# Altium PCB DAQ_v1.PcbDoc (part 1 of 2)
Units mil, origin at the board's own origin, x right, y up, seen from the top; angles counter-clockwise.
Board outline 4750 x 5000 mil, 4 copper layers (Component Side, Ground, Power, Solder Side), stack 61.2 mil thick; 174 components, 158 nets, 771 pads, 270 vias.
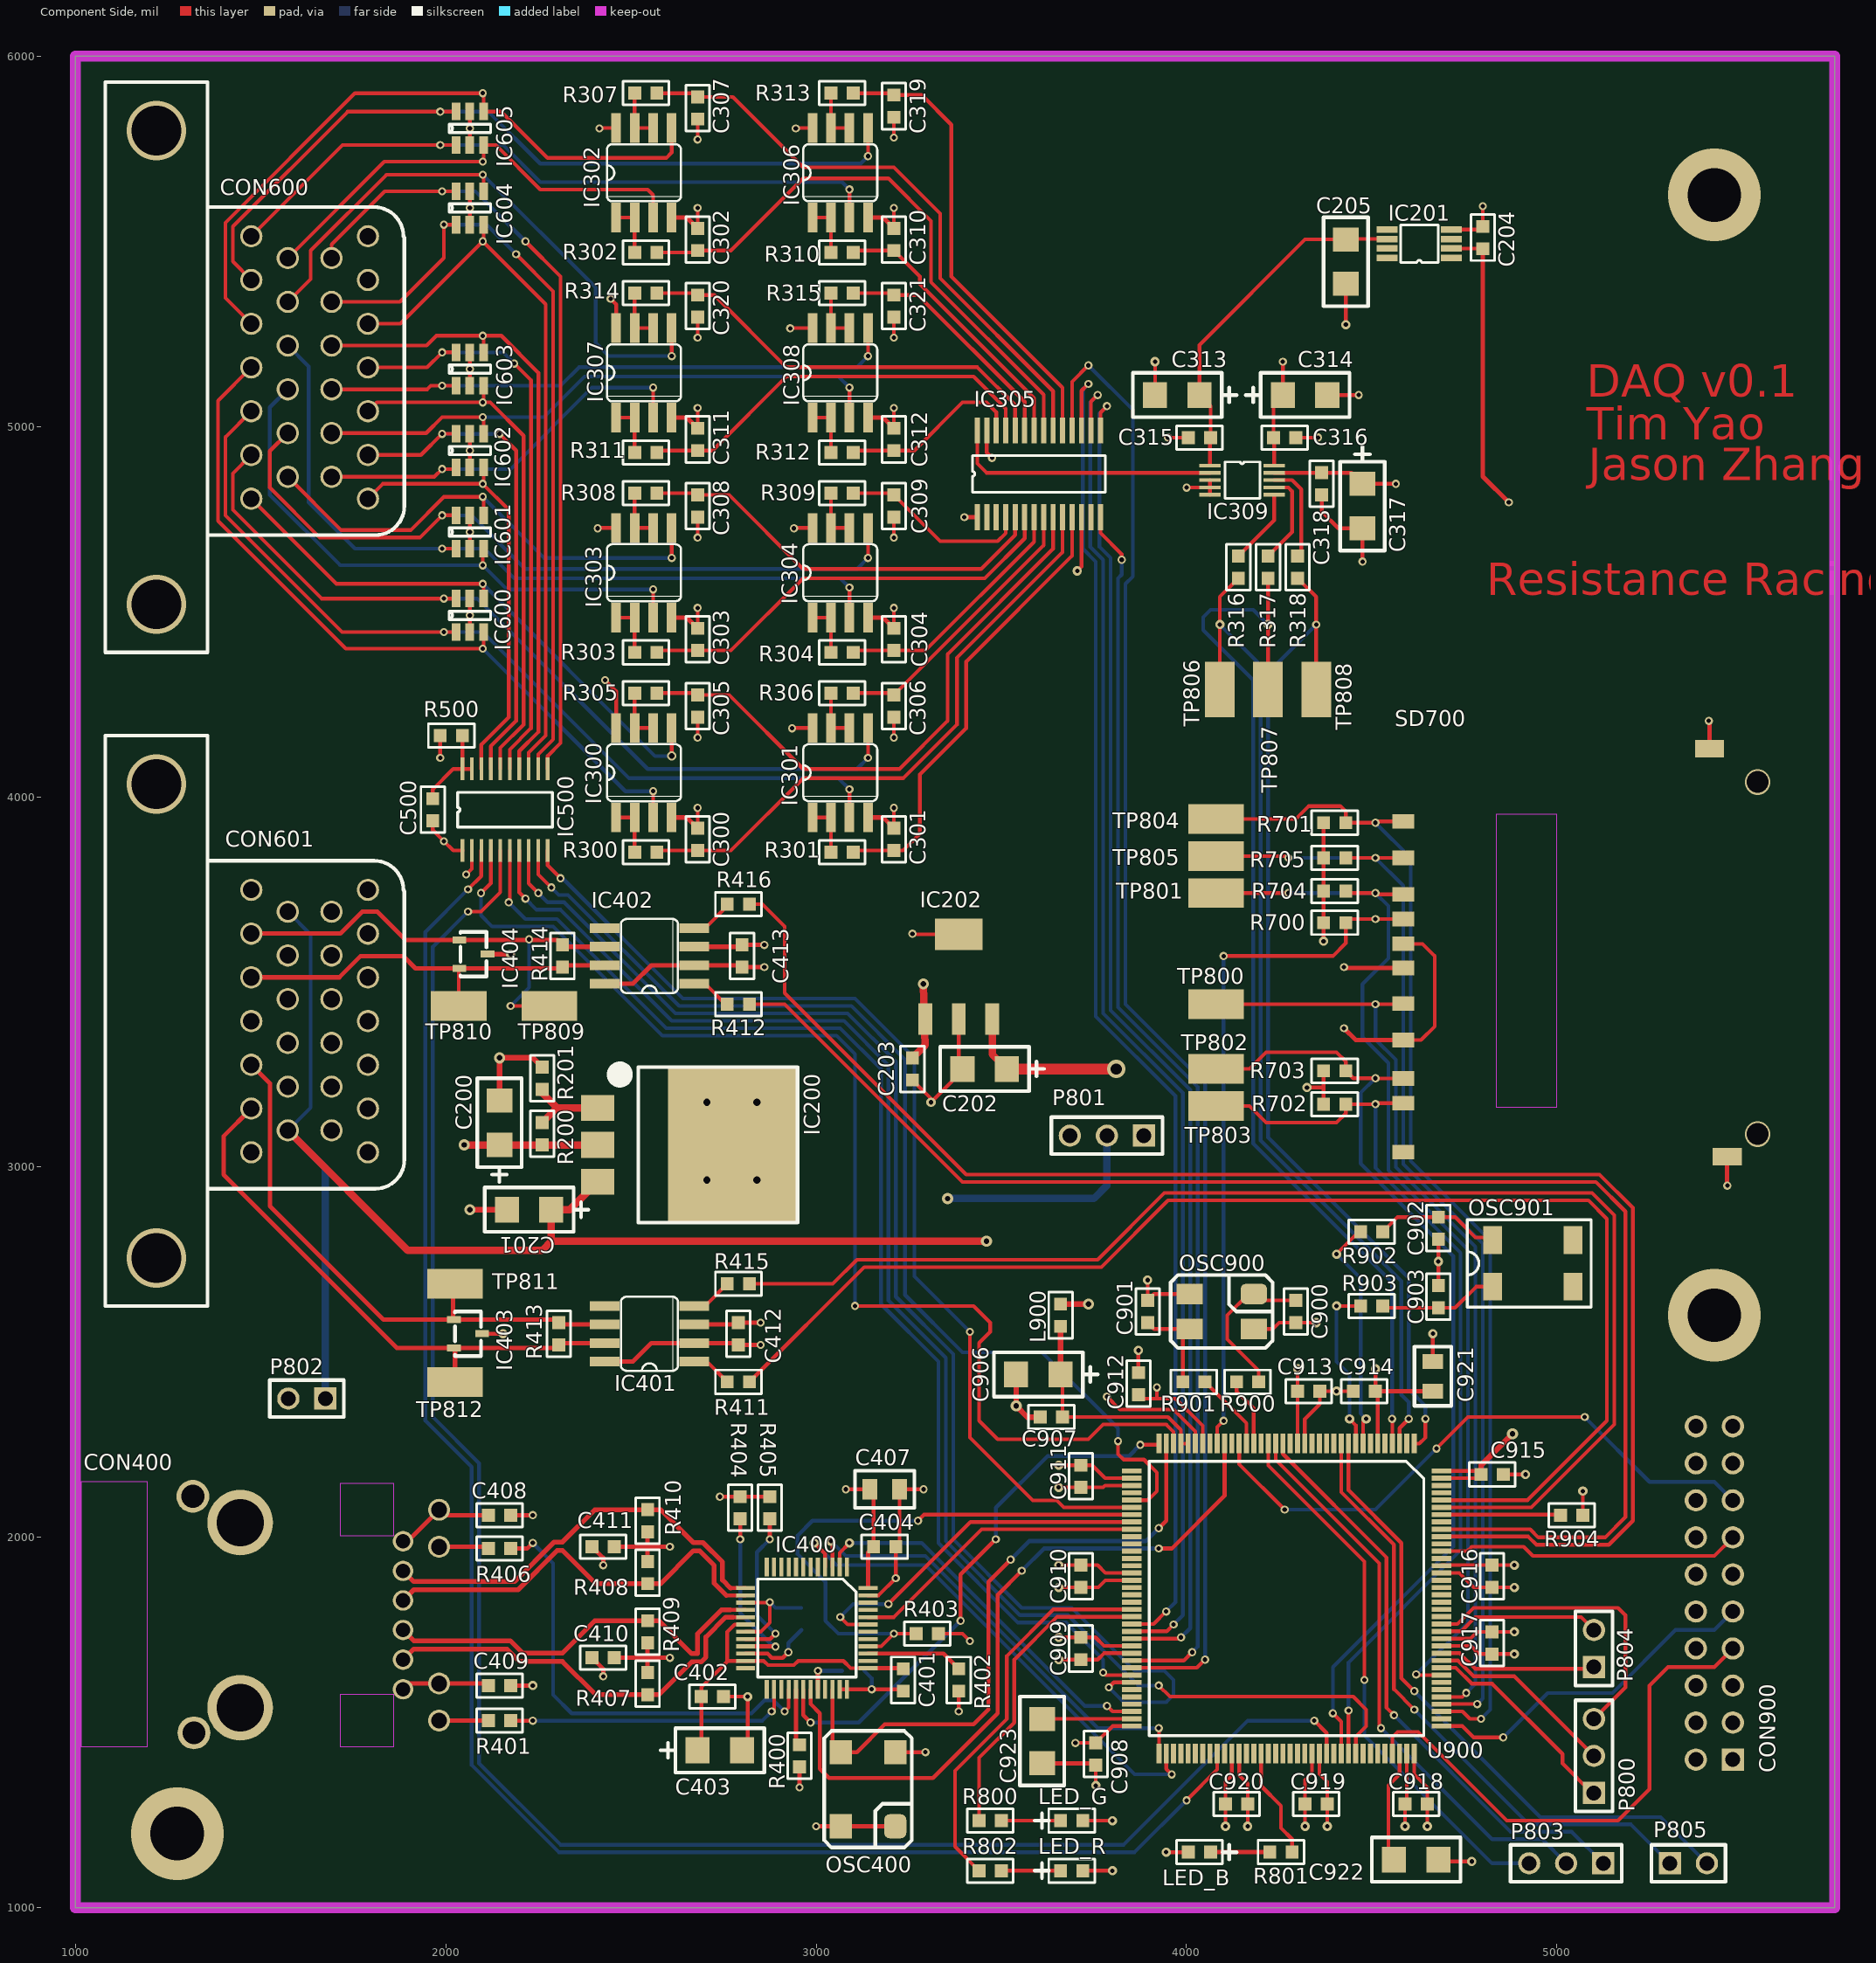
[diagram p0: Component Side view]
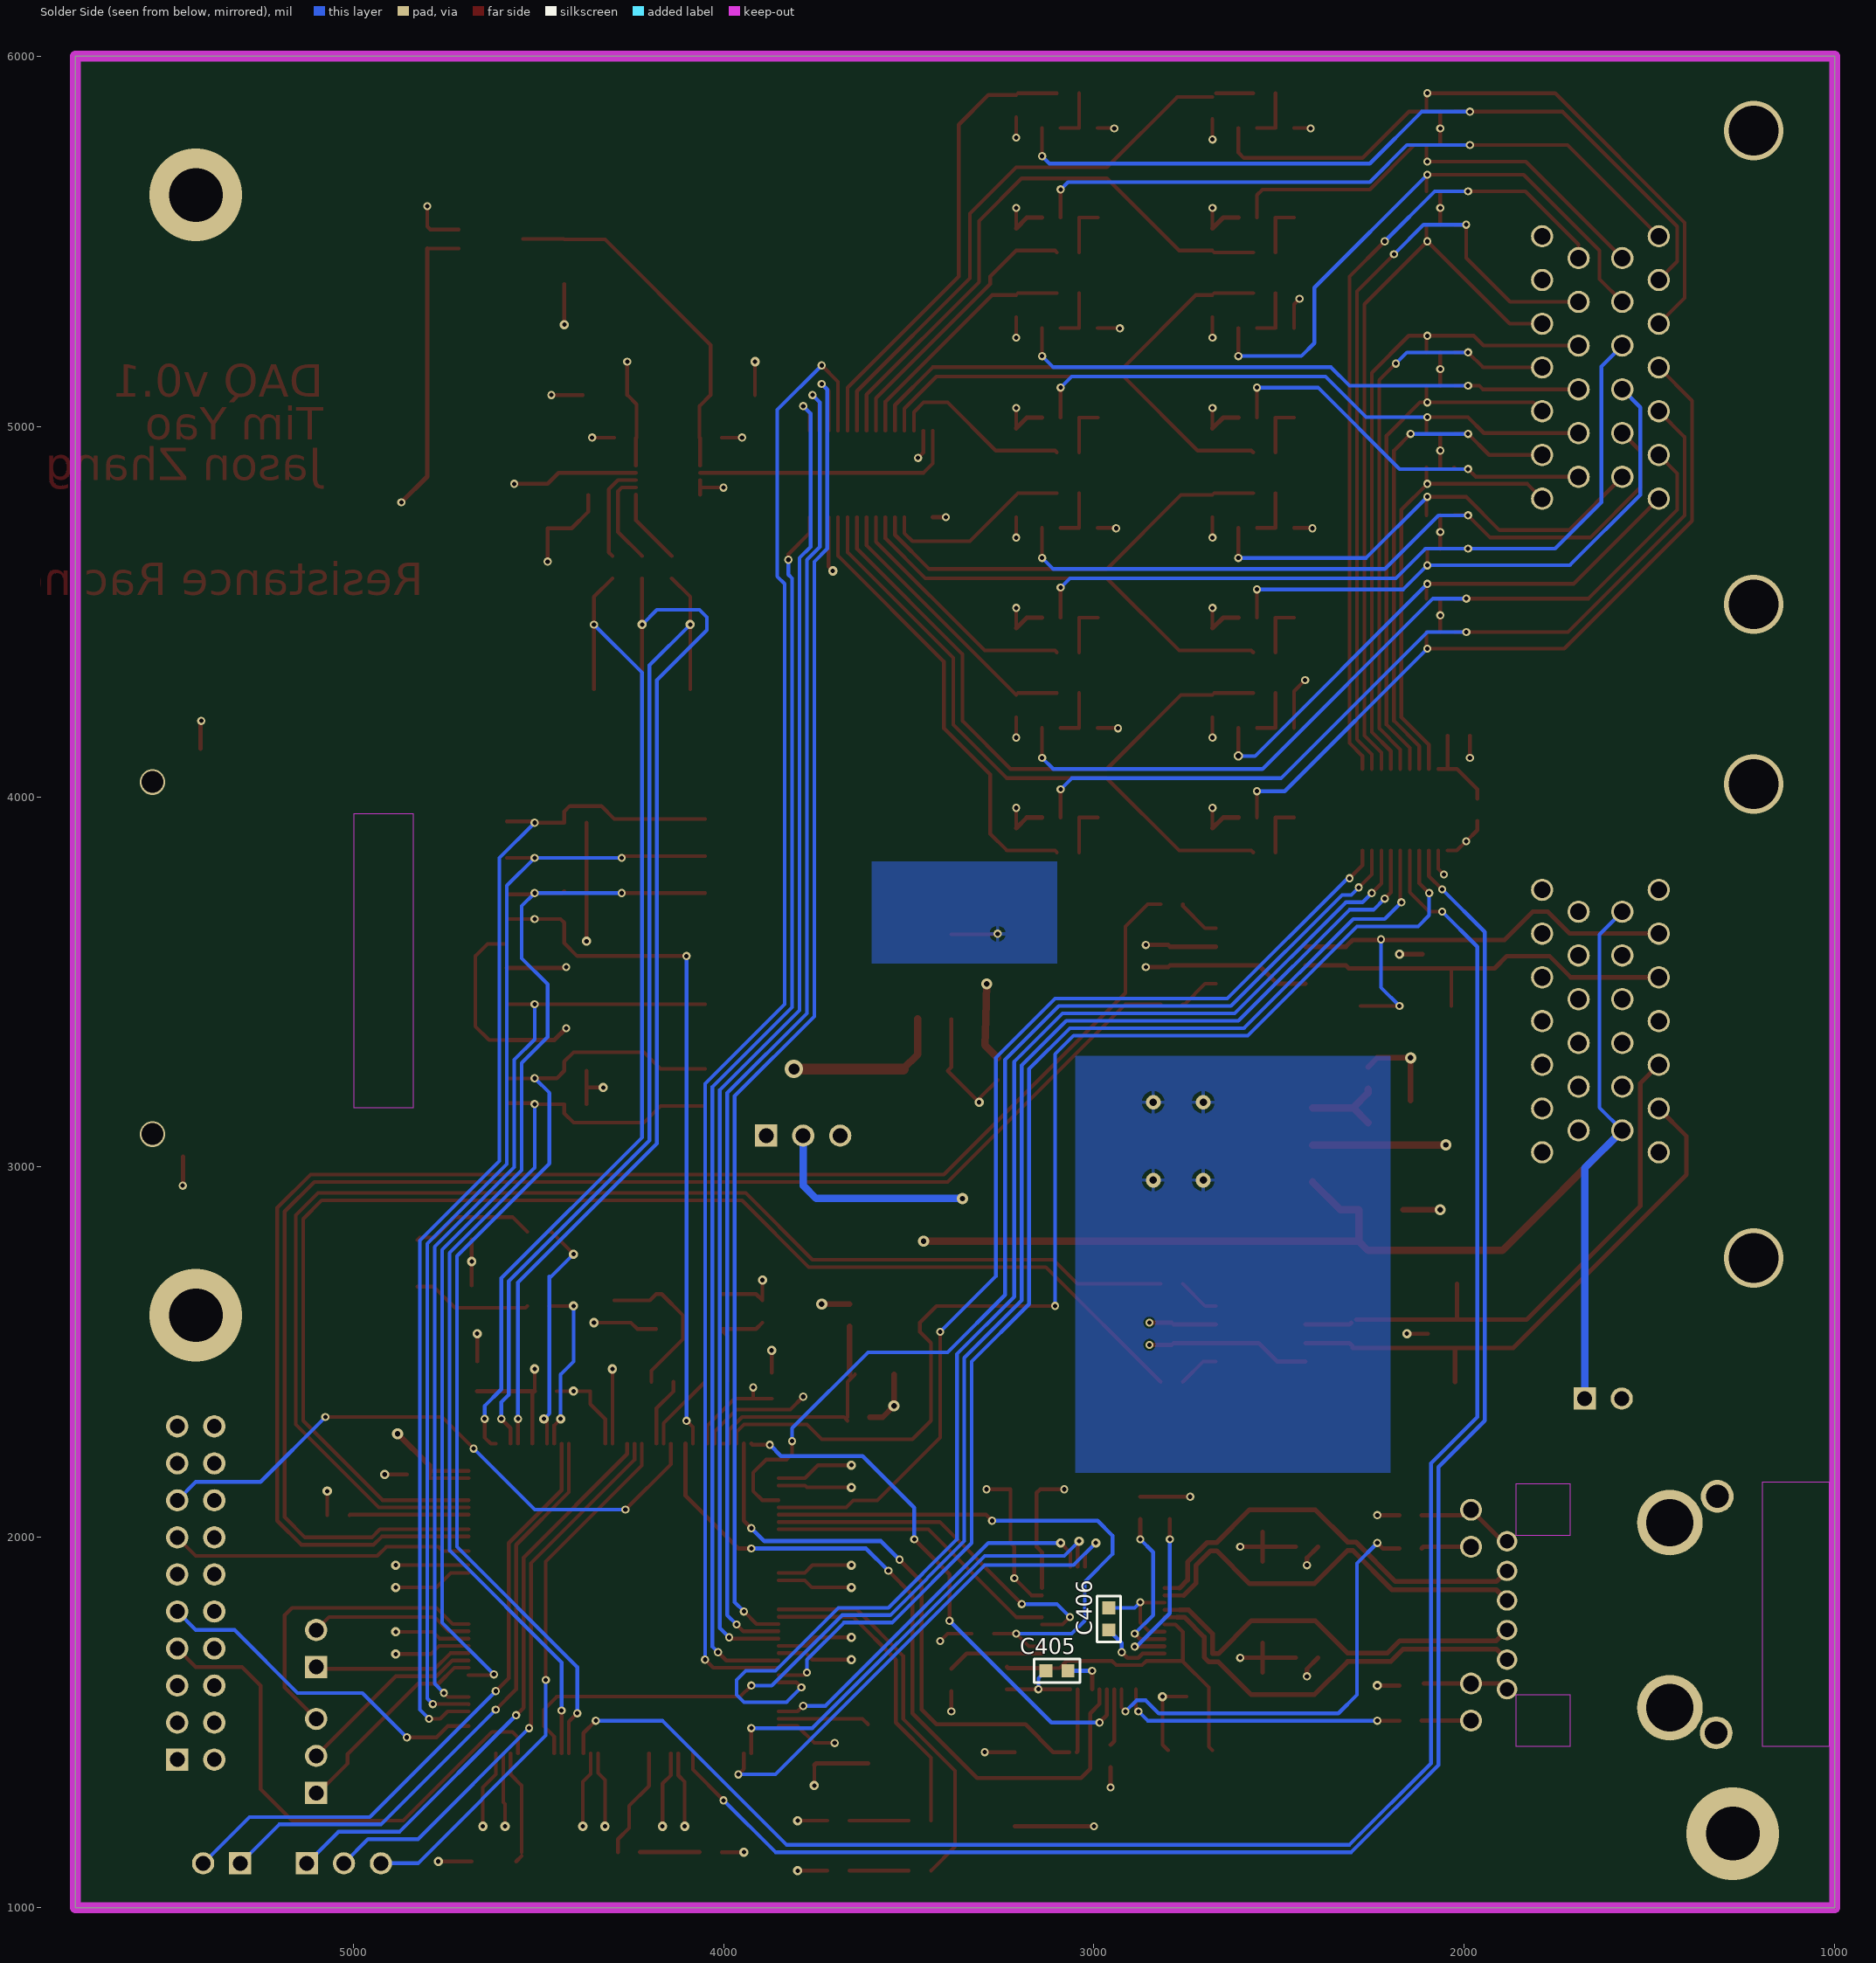
[diagram p1: Solder Side view, seen from below]
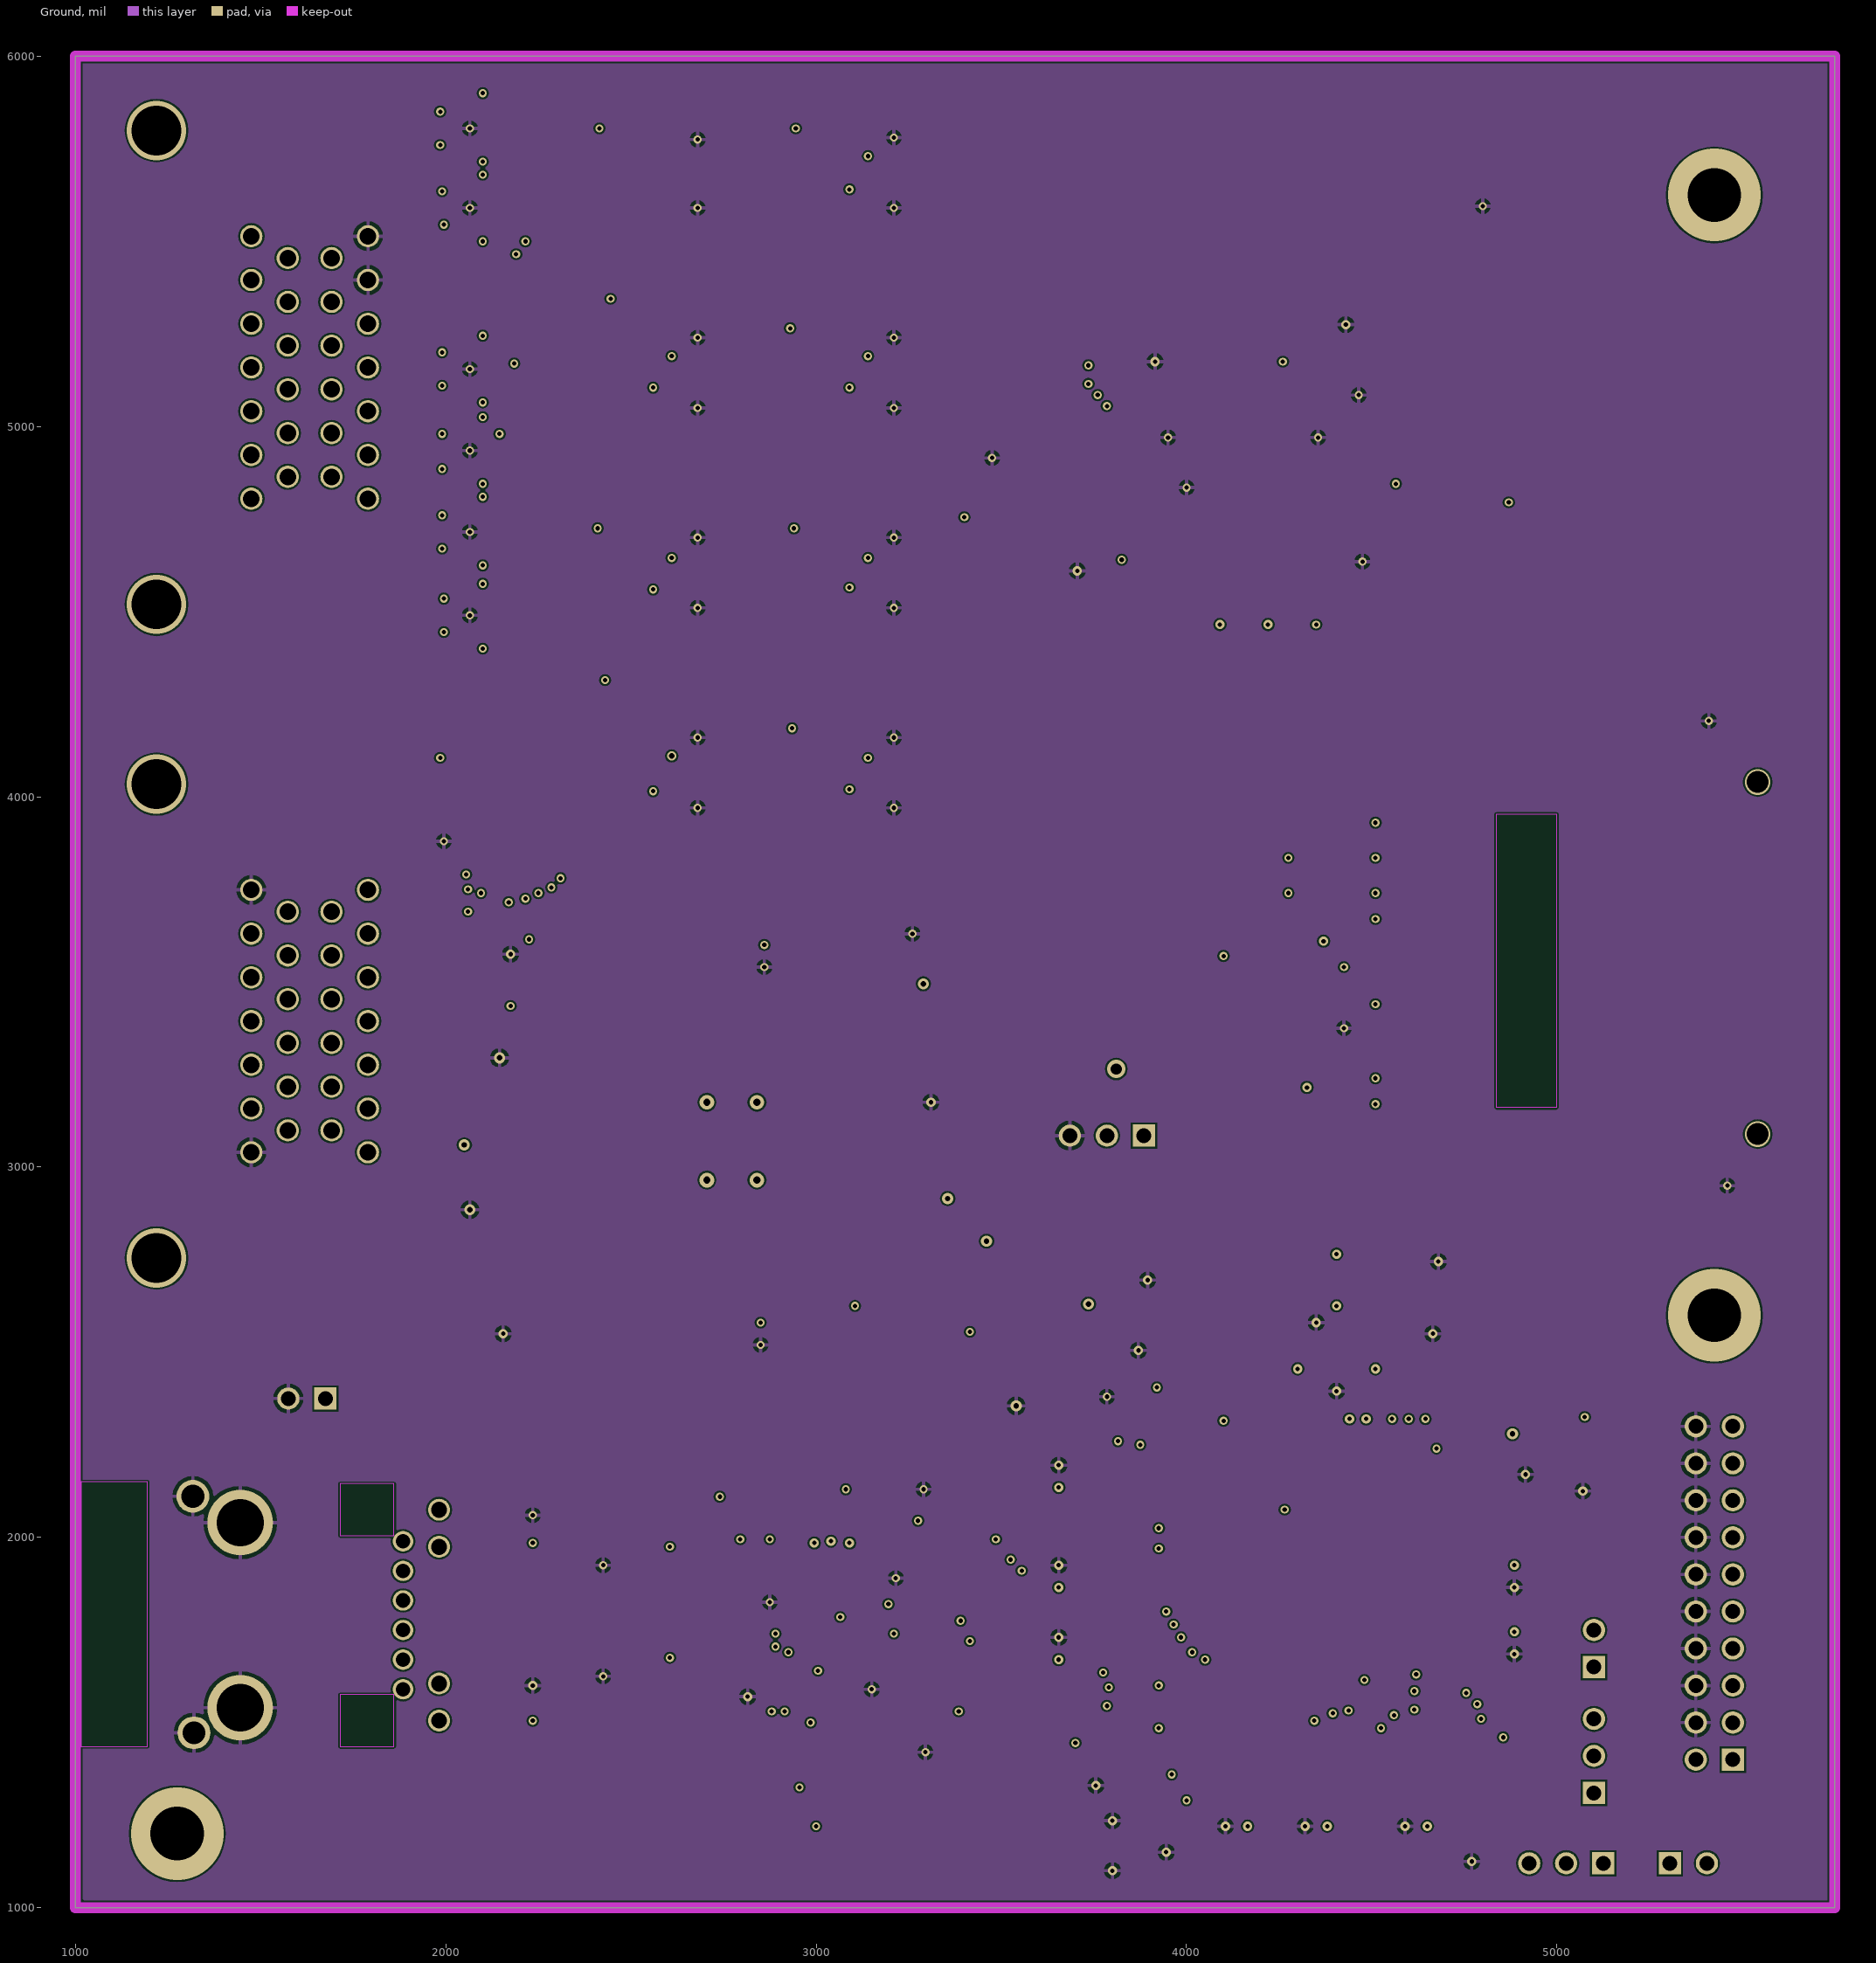
[diagram p2: Ground]
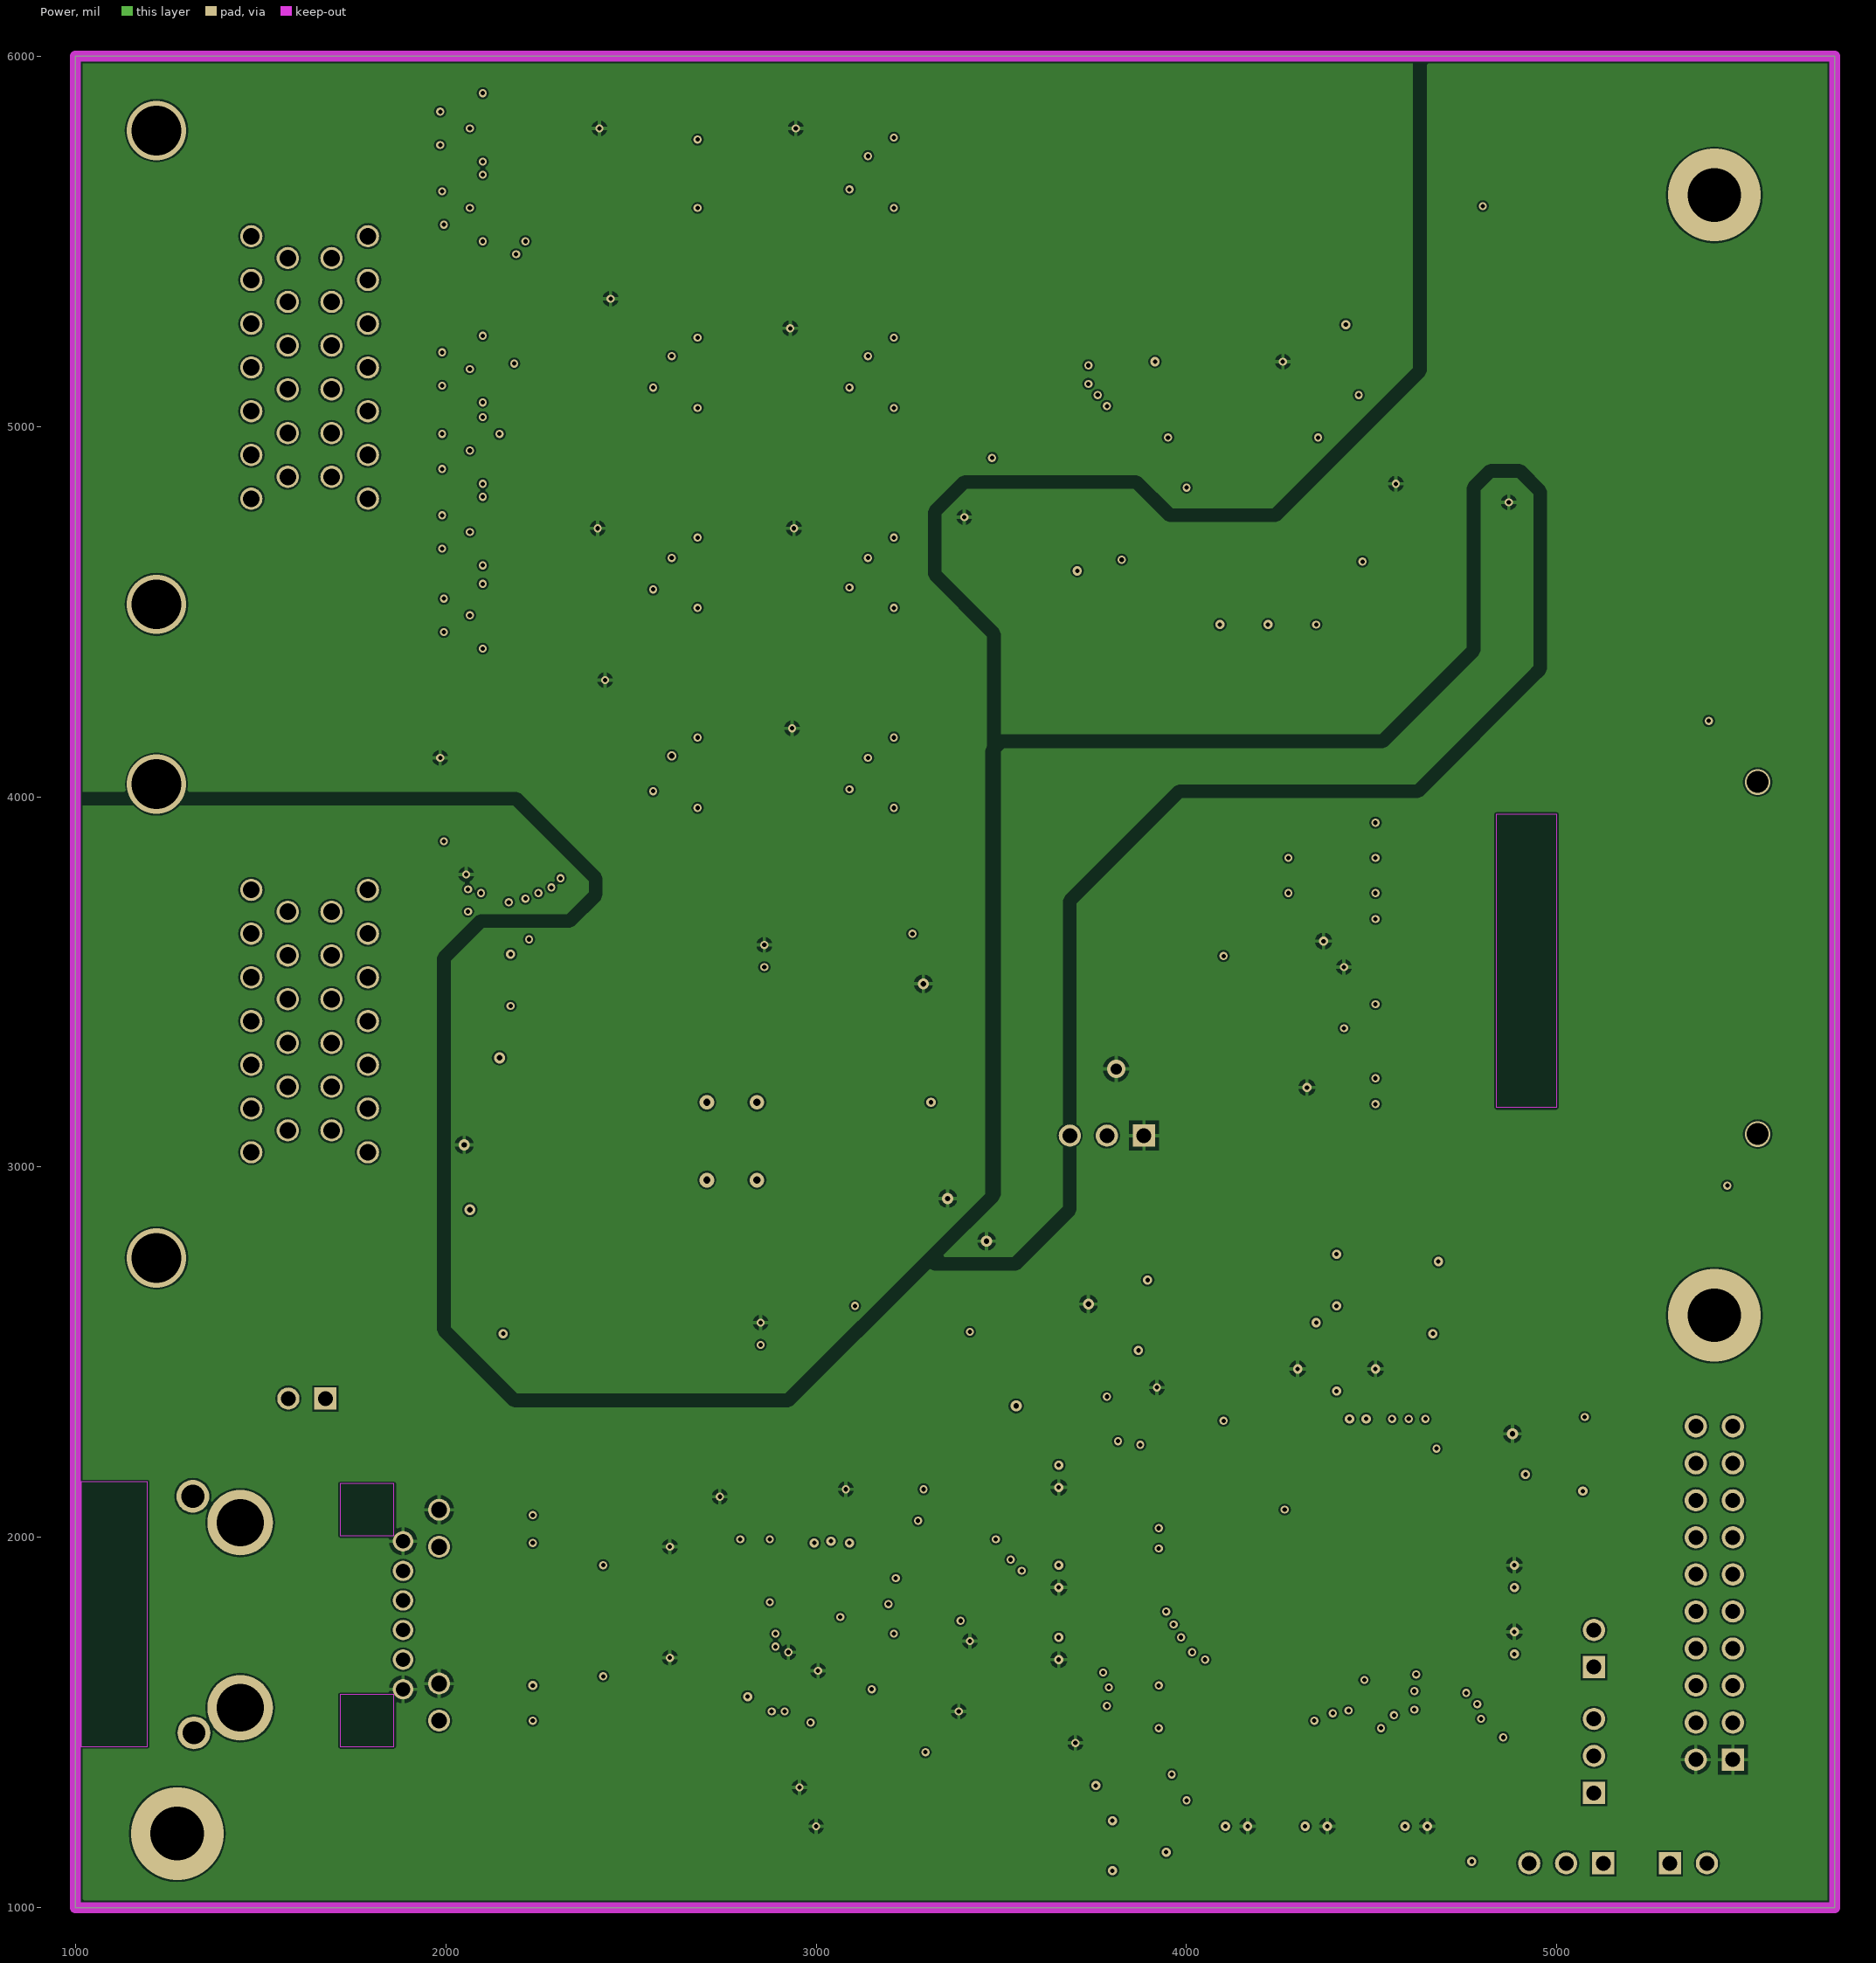
[diagram p3: Power]
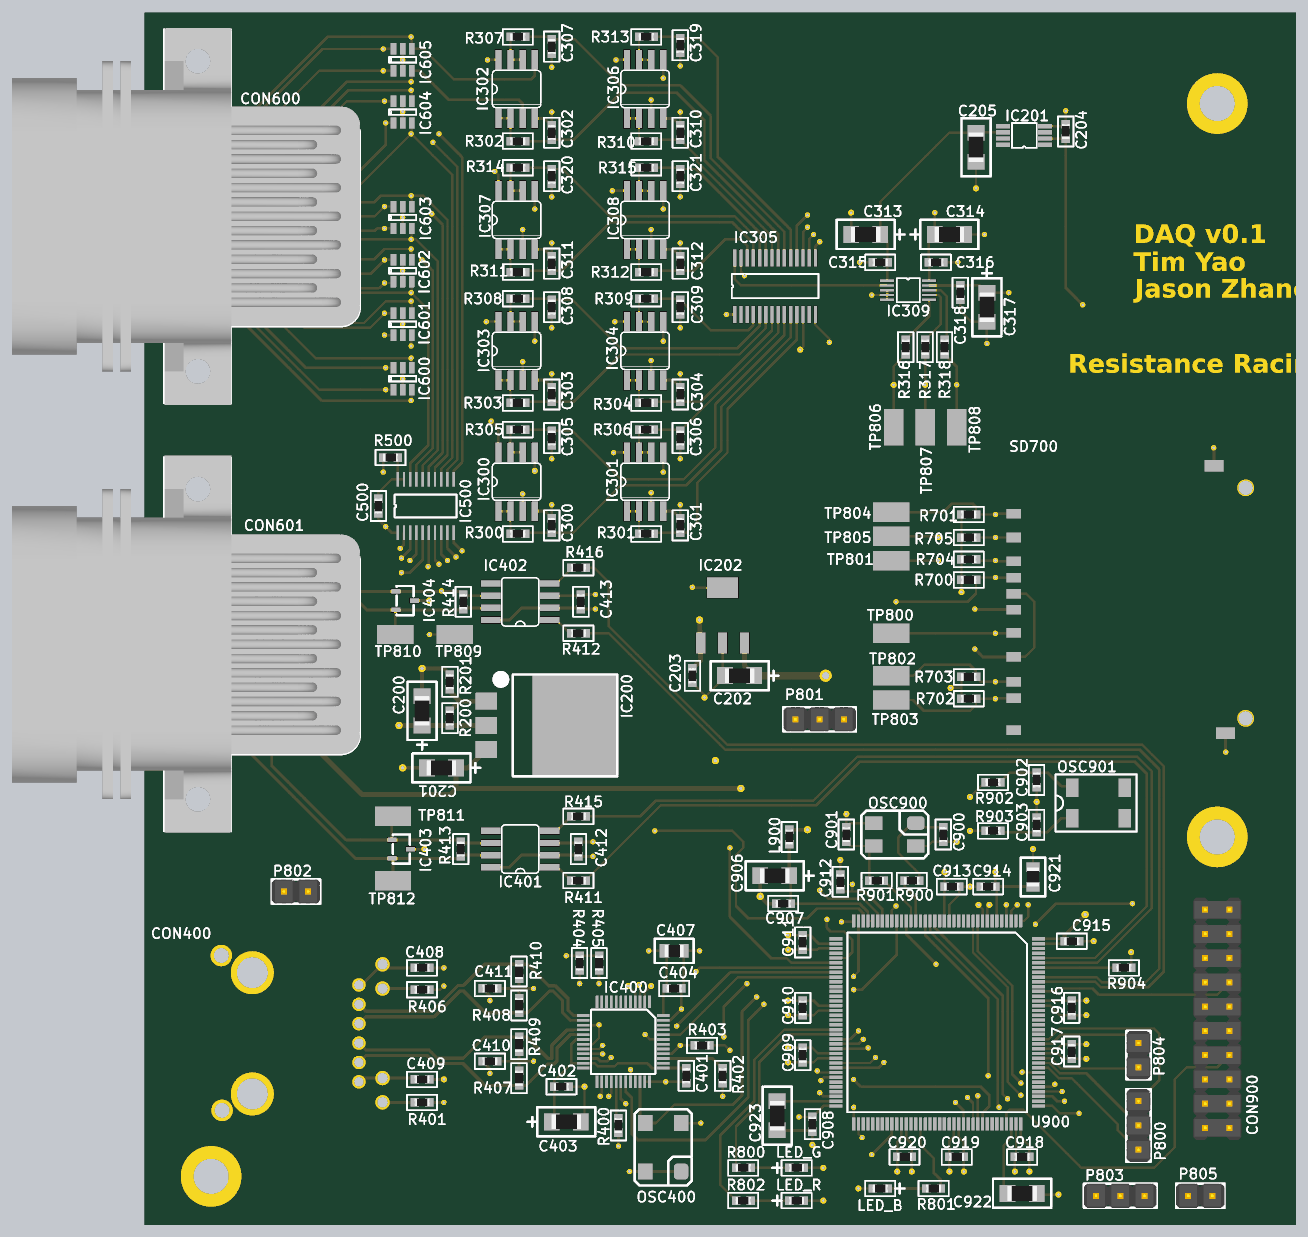
[diagram p5: 3D render of the assembled board from above, using the file's embedded part models]

## Layer stack, top to bottom
Top Solder: solder mask 0.4, Solder Resist, Dk 3.5
Component Side: signal copper 1.4
Dielectric 1: prepreg 5, FR408, Dk 3.66
Ground: signal copper 0.7
Dielectric 3: core 47, FR408, Dk 3.66
Power: signal copper 0.7
Dielectric 2: prepreg 5, FR408, Dk 3.66
Solder Side: signal copper 1.4
Bottom Solder: solder mask 0.4, Solder Resist, Dk 3.5

## Board outline
1000,1000 5750,1000 5750,6000 1000,6000

## Design rules (kind name [scope] priority, off if disabled: settings)
Clearance [All] p1: gap=5
DiffPairsRouting DiffPairsRouting100diff [All] p1: maxlimit=10 minlimit=6.5 mostfreqgap=10 toplayer_prefgap=9.2 toplayer_minwidth=11 toplayer_maxwidth=14 toplayer_prefwidth=13.5 midlayer1_mingap=10 midlayer1_minwidth=11 midlayer1_maxwidth=15 midlayer1_prefwidth=15 midlayer2_mingap=10 midlayer2_minwidth=11 midlayer2_maxwidth=15 midlayer2_prefwidth=15 bottomlayer_prefgap=9.2 bottomlayer_minwidth=11 bottomlayer_maxwidth=14 bottomlayer_prefwidth=13.5 maxuncoupledlength=500
HoleSize [All] p1: absolutevalues=TRUE maxlimit=300 minlimit=1 maxpercent=80.000 minpercent=20.000
MinimumSolderMaskSliver [All] p1: minsoldermaskwidth=5
PolygonConnect [All] p1: connectstyle=Relief reliefconductorwidth=10 reliefentries=4 polygonreliefangle="90 Angle" airgapwidth=10
RoutingVias [All] p1: holewidth=15 width=25 viastyle="Through Hole" minholewidth=10 minwidth=19 maxholewidth=300 maxwidth=300
SilkToBoardRegionClearance [All] p1 off:
SilkToSilkClearance [All] p1 off: silktosilkclearance=10
SilkToSolderMaskClearance [IsPad] p1 off: minsilkscreentomaskgap=10 clearancetoexposedcopper=TRUE
SolderMaskExpansion [All] p1: expansion=0
Width [All] p1: maxlimit=100 minlimit=6 preferedwidth=10
23 further rules are at their usual default settings.

## Classes and differential pairs
net class DAT[0..3]: DAT0 DAT1 DAT2 DAT3
component class "SD Card": R700 R701 R702 R703 R704 R705 SD700
component class "Breakouts and Probes": LED_B LED_G LED_R P800 P801 P802 P803 P804 P805 R800 R801 R802 TP800 TP801 TP802 TP803 TP804 TP805 TP806 TP807 TP808 TP809 TP810 TP811 TP812
component class "Analog Input": C300 C301 C302 C303 C304 C305 C306 C307 C308 C309 C310 C311 C312 C313 C314 C315 C316 C317 C318 C319 C320 C321 IC300 IC301 IC302 IC303 IC304 IC305 IC306 IC307 IC308 IC309 R300 R301 R302 R303 R304 R305 R306 R307 R308 R309 R310 R311 R312 R313 R314 R315 R316 R317 R318
component class "Digital Communications": C401 C402 C403 C404 C405 C406 C407 C408 C409 C410 C411 C412 C413 CON400 IC400 IC401 IC402 IC403 IC404 OSC50 OSC400 R400 R401 R402 R403 R404 R405 R406 R407 R408 R409 R410 R411 R412 R413 R414 R415 R416
component class "Digital Input": C500 IC500 R500
component class "Main Connectors": CON600 CON601 IC600 IC601 IC602 IC603 IC604 IC605
component class "Power Supplies": "5V Rg" C200 C201 C202 C203 C204 C205 CP5 CP6 IC200 IC201 IC202 R200 R201 RP1 RP2
net class A[0..15]: A0 A1 A2 A3 A4 A5 A6 A7 A8 A9 A10 A11 A12 A13 A14 A15
net class AIN[0..15]: AIN0 AIN1 AIN2 AIN3 AIN4 AIN5 AIN6 AIN7 AIN8 AIN9 AIN10 AIN11 AIN12 AIN13 AIN14 AIN15
net class D[0..7]: D0 D1 D2 D3 D4 D5 D6 D7
net class DIN[0..7]: DIN0 DIN1 DIN2 DIN3 DIN4 DIN5 DIN6 DIN7
net class MUX[0..3]: MUX0 MUX1 MUX2 MUX3
component class MCU: C900 C901 C902 C903 C906 C907 C908 C909 C910 C911 C912 C913 C914 C915 C916 C917 C918 C919 C920 C921 C922 C923 CON900 L900 OSC900 OSC901 R900 R901 R902 R903 R904 U900
differential pair TD: +TD_P -TD_N
differential pair RD: +RD_P -RD_N

## Components (designator, comment, footprint, x,y, rotation, side; value= is the part's Value field where it differs from the comment)
C200 "Cap" "SMD1206 Polarized" 2145,3120 r90 top
C201 "Cap" "SMD1206 Polarized" 2225,2885 r180 top
C202 "Cap" "SMD1206 Polarized" 3455,3265 r180 top
C203 "Cap" SMD0603 3260,3265 r90 top
C204 "Capacitor Ceramic" SMD0603 4800,5510 r270 top
C205 "Capacitor Ceramic" SMD1206 4430,5445 r90 top
C300 "Cap" SMD0603 2680,3885 r90 top
C301 "Cap" SMD0603 3210,3885 r90 top
C302 "Cap" SMD0603 2680,5505 r90 top
C303 "Cap" SMD0603 2680,4425 r90 top
C304 "Cap" SMD0603 3210,4425 r90 top
C305 "Cap" SMD0603 2680,4245 r90 top
C306 "Cap" SMD0603 3210,4245 r90 top
C307 "Cap" SMD0603 2680,5860 r90 top
C308 "Cap" SMD0603 2680,4785 r90 top
C309 "Cap" SMD0603 3210,4785 r90 top
C310 "Cap" SMD0603 3210,5505 r90 top
C311 "Cap" SMD0603 2680,4965 r90 top
C312 "Cap" SMD0603 3210,4965 r90 top
C313 "Tantalum" "SMD1206 Polarized" 3975,5085 r180 top
C314 "Tantalum" "SMD1206 Polarized" 4320,5085 r0 top
C315 "Capacitor Ceramic" SMD0603 4035,4970 r0 top
C316 "Capacitor Ceramic" SMD0603 4265,4970 r180 top
C317 "Tantalum" "SMD1206 Polarized" 4475,4785 r270 top
C318 "Capacitor Ceramic" SMD0603 4365,4845 r90 top
C319 "Cap" SMD0603 3210,5865 r90 top
C320 "Cap" SMD0603 2680,5325 r90 top
C321 "Cap" SMD0603 3210,5325 r90 top
C401 "Capacitor Ceramic" SMD0603 3235,1615 r90 top
C402 "Capacitor Ceramic" SMD0603 2720,1570 r180 top
C403 "Cap" "SMD1206 Polarized" 2740,1425 r0 top
C404 "Capacitor Ceramic" SMD0603 3185,1975 r180 top
C405 "Capacitor Ceramic" SMD0603 3100,1640 r180 bottom
C406 "Capacitor Ceramic" SMD0603 2960,1780 r270 bottom
C407 "Capacitor Ceramic" SMD0805 3185,2130 r180 top
C408 "Cap" SMD0603 2145,2060 r180 top
C409 "Cap" SMD0603 2145,1600 r0 top
C410 "Cap" SMD0603 2425,1675 r0 top
C411 "Cap" SMD0603 2425,1975 r0 top
C412 "Capacitor Ceramic" SMD0603 2790,2550 r270 top
C413 "Capacitor Ceramic" SMD0603 2800,3570 r270 top
C500 "Cap" SMD0603 1965,3965 r270 top
C900 "Cap" SMD0603 4295,2610 r90 top
C901 "Cap" SMD0603 3895,2610 r270 top
C902 "Cap" SMD0603 4680,2835 r90 top
C903 "Cap" SMD0603 4680,2650 r270 top
C906 "Cap" "SMD1206 Polarized" 3600,2440 r180 top
C907 "Cap" SMD0603 3635,2325 r180 top
C908 "Cap" SMD0603 3755,1415 r270 top
C909 "Cap" SMD0603 3715,1700 r270 top
C910 "Cap" SMD0603 3715,1895 r270 top
C911 "Cap" SMD0603 3715,2165 r270 top
C912 "Cap" SMD0603 3870,2415 r270 top
C913 "Cap" SMD0603 4330,2395 r180 top
C914 "Cap" SMD0603 4480,2395 r0 top
C915 "Cap" SMD0603 4825,2170 r180 top
C916 "Cap" SMD0603 4825,1895 r90 top
C917 "Cap" SMD0603 4825,1715 r90 top
C918 "Cap" SMD0603 4620,1280 r0 top
C919 "Cap" SMD0603 4350,1280 r0 top
C920 "Cap" SMD0603 4135,1280 r0 top
C921 "Cap" SMD0805 4665,2435 r90 top
C922 "Cap" SMD1206 4620,1130 r180 top
C923 "Cap" SMD1206 3610,1450 r90 top
CON400 "RJ45" RJ45 1445,1540 r90 top
CON600 "26 Pin Conn" "AMP SuperSeal 1.0 26pin" 1355,4700 r90 top
CON601 "26 Pin Conn" "AMP SuperSeal 1.0 26pin" 1355,2935 r90 top
CON900 "PRGM" JTAG/SWO-20PIN 5425,1850 r90 top
IC200 "LT1085" "DPAK - 3pin" 2600,3060 r270 top
IC201 "REF5050AIDGKT" "VSSOP-8 (DGK)" 4715,5455 r180 top
IC202 "LM3940" SOT-223 3385,3400 r0 top
IC300 "OPA2344" SOIC-8 2535,4065 r0 top
IC301 "OPA2344" SOIC-8 3065,4065 r0 top
IC302 "OPA2344" SOIC-8 2535,5685 r0 top
IC303 "OPA2344" SOIC-8 2535,4605 r0 top
IC304 "OPA2344" SOIC-8 3065,4605 r0 top
IC305 "ADG706" TSSOP-28 3435,4755 r90 top
IC306 "OPA2344" SOIC-8 3065,5685 r0 top
IC307 "OPA2344" SOIC-8 2535,5145 r0 top
IC308 "OPA2344" SOIC-8 3065,5145 r0 top
IC309 "ADC161S626" "VSSOP-10 (DGS)" 4150,4855 r270 top
IC400 "DP83848I" LQFP-48 2975,1755 r180 top locked
IC401 "CAN Chip" SOIC-8 2550,2550 r90 top
IC402 "CAN Chip" SOIC-8 2550,3570 r90 top
IC403 "ESD-CAN" SOT-23-3 2060,2550 r270 top
IC404 "ESD-CAN" SOT-23-3 2075,3575 r270 top
IC500 "LSF0108" TSSOP-20 2160,3965 r90 top
IC600 "ESDA6V1BC6" SOT23-6L 2065,4490 r90 top
IC601 "ESDA6V1BC6" SOT23-6L 2065,4715 r90 top
IC602 "ESDA6V1BC6" SOT23-6L 2065,4935 r90 top
IC603 "ESDA6V1BC6" SOT23-6L 2065,5155 r90 top
IC604 "ESDA6V1BC6" SOT23-6L 2065,5590 r90 top
IC605 "ESDA6V1BC6" SOT23-6L 2065,5805 r90 top
L900 "BEAD" SMD0603 3660,2600 r270 top
LED_B "LED" "SMD0603 POLARIZED" 4035,1150 r180 top
LED_G "LED" "SMD0603 POLARIZED" 3690,1235 r0 top
LED_R "LED" "SMD0603 POLARIZED" 3690,1100 r0 top
OSC400 "Oscillator" SM77H-OSC 3140,1320 r270 top
OSC900 "8MHz Oscillator" ABMM2-OSC 4095,2610 r180 top
OSC901 "32.768KHz Oscillator" MC-306-OSC 4935,2740 r0 top
P800 "Header" "HEADER 3X1" 5100,1510 r90 top
P801 "Power" "HEADER 3X1" 3685,3085 r180 top
P802 "12V" "Header 2x1" 1625,2375 r180 top
P803 "Header" "HEADER 3X1" 4925,1120 r180 top
P804 "Header" "Header 2x1" 5100,1700 r90 top
P805 "Header" "Header 2x1" 5355,1120 r0 top
R200 "Res" SMD0603 2260,3090 r90 top
R201 "Res" SMD0603 2260,3240 r90 top
R300 "Res" SMD0603 2540,3850 r0 top
R301 "Res" SMD0603 3070,3850 r0 top
R302 "Res" SMD0603 2540,5470 r0 top
R303 "Res" SMD0603 2540,4390 r0 top
R304 "Res" SMD0603 3070,4390 r0 top
R305 "Res" SMD0603 2540,4280 r180 top
R306 "Res" SMD0603 3070,4280 r180 top
R307 "Res" SMD0603 2540,5900 r180 top
R308 "Res" SMD0603 2540,4820 r180 top
R309 "Res" SMD0603 3070,4820 r180 top
R310 "Res" SMD0603 3070,5470 r0 top
R311 "Res" SMD0603 2540,4930 r0 top
R312 "Res" SMD0603 3070,4930 r0 top
R313 "Res" SMD0603 3070,5900 r180 top
R314 "Res" SMD0603 2540,5360 r180 top
R315 "Res" SMD0603 3070,5360 r180 top
R316 "Res" SMD0603 4140,4620 r270 top
R317 "Res" SMD0603 4220,4620 r270 top
R318 "Res" SMD0603 4300,4620 r270 top
R400 "Res" SMD0603 2955,1410 r270 top
R401 "Res" SMD0603 2145,1505 r0 top
R402 "Res" SMD0603 3385,1615 r270 top
R403 "Res" SMD0603 3300,1740 r0 top
R404 "Res" SMD0603 2795,2080 r270 top
R405 "Res" SMD0603 2875,2080 r270 top
R406 "Res" SMD0603 2145,1970 r0 top
R407 "Res" SMD0603 2545,1605 r270 top
R408 "Res" SMD0603 2545,1905 r270 top
R409 "Res" SMD0603 2545,1745 r270 top
R410 "Res" SMD0603 2545,2045 r270 top
R411 "Res" SMD0603 2790,2420 r0 top
R412 "Res" SMD0603 2790,3440 r0 top
R413 "Res" SMD0603 2305,2550 r90 top
R414 "Res" SMD0603 2315,3570 r90 top
R415 "Res" SMD0603 2790,2685 r0 top
R416 "Res" SMD0603 2790,3710 r0 top
R500 "Res" SMD0603 2015,4165 r180 top
R700 "Res" SMD0603 4400,3660 r0 top
R701 "Res" SMD0603 4400,3930 r0 top
R702 "Res" SMD0603 4400,3170 r0 top
R703 "Res" SMD0603 4400,3260 r180 top
R704 "Res" SMD0603 4400,3745 r180 top
R705 "Res" SMD0603 4400,3835 r180 top
R800 "Res" SMD0603 3470,1235 r180 top
R801 "Res" SMD0603 4255,1150 r0 top
R802 "Res" SMD0603 3470,1100 r180 top
R900 "Res" SMD0603 4165,2420 r180 top
R901 "Res" SMD0603 4020,2420 r0 top
R902 "Res" SMD0603 4500,2825 r180 top
R903 "Res" SMD0603 4500,2625 r180 top
R904 "Res" SMD0603 5040,2060 r180 top
SD700 "SD Card Slot" SDCARD-AMP 4585,3595 r0 top locked
TP800 "Test Point" "Test Point" 4080,3440 r0 top
TP801 "Test Point" "Test Point" 4080,3740 r0 top
TP802 "Test Point" "Test Point" 4080,3265 r0 top
TP803 "Test Point" "Test Point" 4080,3165 r0 top
TP804 "Test Point" "Test Point" 4080,3940 r0 top
TP805 "Test Point" "Test Point" 4080,3840 r0 top
TP806 "Test Point" "Test Point" 4090,4290 r270 top
TP807 "Test Point" "Test Point" 4220,4290 r90 top
TP808 "Test Point" "Test Point" 4350,4290 r90 top
TP809 "Test Point" "Test Point" 2280,3435 r0 top
TP810 "Test Point" "Test Point" 2035,3435 r0 top
TP811 "Test Point" "Test Point" 2025,2685 r0 top
TP812 "Test Point" "Test Point" 2025,2420 r0 top
U900 "STM32F429ZIT6U" LQPF144 4270,1835 r180 top locked

## Footprints (in the part's own frame and the unit in brackets; to place one, negate y for a bottom-side part, rotate by r counter-clockwise, add the part's x,y. Pads: shape width x height; smd on the part's side, far side on the other; paste and mask are expansions set on the pad)
ABMM2-OSC [mm]
  rrect50% 1.8x1.4 smd: 1(-2.2,-1.2)
  rect 1.8x1.4 smd: 2(2.2,-1.2) 3(2.2,1.2) 4(-2.2,1.2)
  silkscreen extent -3.5,-2.5 3.5,2.5
"AMP SuperSeal 1.0 26pin" [mil]
  round 30 on Top Overlay: 0(55,-75)
  round 60 hole 45: 1(105,-120) 2(223.11,-120) 3(341.22,-120) 4(459.33,-120) 5(577.44,-120) 6(695.55,-120) 7(813.66,-120) 8(164.06,-218.43) 9(282.17,-218.43) 10(400.28,-218.43) 11(518.39,-218.43) 12(636.5,-218.43) 13(754.61,-218.43) 14(164.06,-336.54) 15(282.17,-336.54) 16(400.28,-336.54) 17(518.39,-336.54) 18(636.5,-336.54) 19(754.61,-336.54) 20(105,-434.96) 21(223.11,-434.96) 22(341.22,-434.96) 23(459.33,-434.96) 24(577.44,-434.96) 25(695.55,-434.96) 26(813.66,-434.96)
  silkscreen extent -310,-533 1230,274, body extent -318,-535 1238,902, height 1091
"DPAK - 3pin" [mil] "LT1085"
  rect 70x90 smd: 1(-100,-190) 2(0,-190) 3(100,-190)
  rect 420x350 smd: 5(0,175)
  silkscreen extent -210,-140 210,350, body extent -208,-80 208,350, height 184
"Header 2x1" [mil]
  rect 60x60 hole 40: 1(-50,0)
  round 60 hole 40: 2(50,0)
  silkscreen extent -100,-50 100,50, body extent -100,-50 100,50, height 374
"HEADER 3X1" [mil]
  rect 60x60 hole 40: 1(-200,0)
  round 60 hole 40: 2(-100,0) 3(0,0)
  silkscreen extent -250,-50 50,50, body extent -250,-50 50,50, height 374
JTAG/SWO-20PIN [mil]
  rect 60x60 hole 40: 1(-450,-50)
  round 60 hole 40: 2(-450,50) 3(-350,-50) 4(-350,50) 5(-250,-50) 6(-250,50) 7(-150,-50) 8(-150,50) 9(-50,-50) 10(-50,50) 11(50,-50) 12(50,50) 13(150,-50) 14(150,50) 15(250,-50) 16(250,50) 17(350,-50) 18(350,50) 19(450,-50) 20(450,50)
  body extent -500,-100 500,100, height 374
LQFP-48 [mm] "Specifically: PT (S-PQFP-G48)"
  rect 0.28x1.3 smd: 1(-2.75,-4.2) 2(-2.25,-4.2) 3(-1.75,-4.2) 4(-1.25,-4.2) 5(-0.75,-4.2) 6(-0.25,-4.2) 7(0.25,-4.2) 8(0.75,-4.2) 9(1.25,-4.2) 10(1.75,-4.2) 11(2.25,-4.2) 12(2.75,-4.2) 25(2.75,4.2) 26(2.25,4.2) 27(1.75,4.2) 28(1.25,4.2) 29(0.75,4.2) 30(0.25,4.2) 31(-0.25,4.2) 32(-0.75,4.2) 33(-1.25,4.2) 34(-1.75,4.2) 35(-2.25,4.2) 36(-2.75,4.2)
  rect 1.3x0.28 smd: 13(4.2,-2.75) 14(4.2,-2.25) 15(4.2,-1.75) 16(4.2,-1.25) 17(4.2,-0.75) 18(4.2,-0.25) 19(4.2,0.25) 20(4.2,0.75) 21(4.2,1.25) 22(4.2,1.75) 23(4.2,2.25) 24(4.2,2.75) 37(-4.2,2.75) 38(-4.2,2.25) 39(-4.2,1.75) 40(-4.2,1.25) 41(-4.2,0.75) 42(-4.2,0.25) 43(-4.2,-0.25) 44(-4.2,-0.75) 45(-4.2,-1.25) 46(-4.2,-1.75) 47(-4.2,-2.25) 48(-4.2,-2.75)
  silkscreen extent -3.36,-3.36 3.36,3.36, body extent -3.36,-3.36 3.36,3.36, height 0.65
LQPF144 [mm]
  rect 0.35x1.35 smd: 1(-8.75,-10.625) 2(-8.25,-10.625) 3(-7.75,-10.625) 4(-7.25,-10.625) 5(-6.75,-10.625) 6(-6.25,-10.625) 7(-5.75,-10.625) 8(-5.25,-10.625) 9(-4.75,-10.625) 10(-4.25,-10.625) 11(-3.75,-10.625) 12(-3.25,-10.625) 13(-2.75,-10.625) 14(-2.25,-10.625) 15(-1.75,-10.625) 16(-1.25,-10.625) 17(-0.75,-10.625) 18(-0.25,-10.625) 19(0.25,-10.625) 20(0.75,-10.625) 21(1.25,-10.625) 22(1.75,-10.625) 23(2.25,-10.625) 24(2.75,-10.625) 25(3.25,-10.625) 26(3.75,-10.625) 27(4.25,-10.625) 28(4.75,-10.625) 29(5.25,-10.625) 30(5.75,-10.625) 31(6.25,-10.625) 32(6.75,-10.625) 33(7.25,-10.625) 34(7.75,-10.625) 35(8.25,-10.625) 36(8.75,-10.625) 73(8.75,10.625) 74(8.25,10.625) 75(7.75,10.625) 76(7.25,10.625) 77(6.75,10.625) 78(6.25,10.625) 79(5.75,10.625) 80(5.25,10.625) 81(4.75,10.625) 82(4.25,10.625) 83(3.75,10.625) 84(3.25,10.625) 85(2.75,10.625) 86(2.25,10.625) 87(1.75,10.625) 88(1.25,10.625) 89(0.75,10.625) 90(0.25,10.625) 91(-0.25,10.625) 92(-0.75,10.625) 93(-1.25,10.625) 94(-1.75,10.625) 95(-2.25,10.625) 96(-2.75,10.625) 97(-3.25,10.625) 98(-3.75,10.625) 99(-4.25,10.625) 100(-4.75,10.625) 101(-5.25,10.625) 102(-5.75,10.625) 103(-6.25,10.625) 104(-6.75,10.625) 105(-7.25,10.625) 106(-7.75,10.625) 107(-8.25,10.625) 108(-8.75,10.625)
  rect 1.35x0.35 smd: 37(10.625,-8.75) 38(10.625,-8.25) 39(10.625,-7.75) 40(10.625,-7.25) 41(10.625,-6.75) 42(10.625,-6.25) 43(10.625,-5.75) 44(10.625,-5.25) 45(10.625,-4.75) 46(10.625,-4.25) 47(10.625,-3.75) 48(10.625,-3.25) 49(10.625,-2.75) 50(10.625,-2.25) 51(10.625,-1.75) 52(10.625,-1.25) 53(10.625,-0.75) 54(10.625,-0.25) 55(10.625,0.25) 56(10.625,0.75) 57(10.625,1.25) 58(10.625,1.75) 59(10.625,2.25) 60(10.625,2.75) 61(10.625,3.25) 62(10.625,3.75) 63(10.625,4.25) 64(10.625,4.75) 65(10.625,5.25) 66(10.625,5.75) 67(10.625,6.25) 68(10.625,6.75) 69(10.625,7.25) 70(10.625,7.75) 71(10.625,8.25) 72(10.625,8.75) 109(-10.625,8.75) 110(-10.625,8.25) 111(-10.625,7.75) 112(-10.625,7.25) 113(-10.625,6.75) 114(-10.625,6.25) 115(-10.625,5.75) 116(-10.625,5.25) 117(-10.625,4.75) 118(-10.625,4.25) 119(-10.625,3.75) 120(-10.625,3.25) 121(-10.625,2.75) 122(-10.625,2.25) 123(-10.625,1.75) 124(-10.625,1.25) 125(-10.625,0.75) 126(-10.625,0.25) 127(-10.625,-0.25) 128(-10.625,-0.75) 129(-10.625,-1.25) 130(-10.625,-1.75) 131(-10.625,-2.25) 132(-10.625,-2.75) 133(-10.625,-3.25) 134(-10.625,-3.75) 135(-10.625,-4.25) 136(-10.625,-4.75) 137(-10.625,-5.25) 138(-10.625,-5.75) 139(-10.625,-6.25) 140(-10.625,-6.75) 141(-10.625,-7.25) 142(-10.625,-7.75) 143(-10.625,-8.25) 144(-10.625,-8.75)
  silkscreen extent -9.41,-9.41 9.41,9.41, body extent -9.4,-9.4 9.4,9.4, height 0.65
MC-306-OSC [mm]
  rect 1.3x1.9 smd: 1(-2.75,-1.6) 2(2.75,-1.6) 3(2.75,1.6) 4(-2.75,1.6)
  silkscreen extent -4.5,-3 4,3
RJ45 [mm]
  round 1.4 hole 1: 1(1.27,-11.17) 2(3.3,-11.17) 3(5.33,-11.17) 4(7.36,-11.17) 5(9.39,-11.17) 6(11.42,-11.17)
  round 1.5 hole 1.1: 7(-0.88,-13.64) 8(1.66,-13.64) 9(11.04,-13.64) 10(13.58,-13.64)
  round 2.25 hole 1.57: S(-1.72,3.17) S(14.5,3.25)
  round 4.5 hole 3.25: S(0,0) S(12.7,0)
  Keep-Out Layer region: -2.667,6.35 15.494,6.35 15.494,10.922 -2.667,10.922
  Keep-Out Layer region: -2.667,-10.541 0.889,-10.541 0.889,-6.858 -2.667,-6.858
  Keep-Out Layer region: 11.811,-10.541 15.367,-10.541 15.367,-6.858 11.811,-6.858
  body extent -1.8,-14.6 14.5,10.92, height 13.49
SDCARD-AMP [mm] "Amphenol 101003136802"
  rect 1.5x1 smd: 1(0,6.1) 2(0,3.6) 3(0,0.2) 4(0,-1.45) 5(0,-3.9) 6(0,-6.4) 7(0,-9.03) 8(0,-10.73) 9(0,8.6) 10(0,1.9) 11(0,-14.08)
  rect 2x1.2 smd: GND(21.01,13.6) GND(22.21,-14.4)
  Keep-Out Layer region: 6.4,9.1 10.51,9.1 10.51,-11.03 6.4,-11.03
  body extent 0,-14.45 28.9,14.45, height 2.7
SM77H-OSC [mil]
  rrect50% 65x60 smd: 1(100,73.5)
  rect 65x60 smd: 2(-100,73.5) 3(-100,-73.5) 4(100,-73.5)
  silkscreen extent -157,-118 157,118
SMD0603 [mil]
  rect 35x35 smd: 1(-30,0) 2(30,0)
  silkscreen extent -62,-32 62,32, body extent -31,-16 32,16, height 18
"SMD0603 POLARIZED" [mil]
  rect 35x35 smd: 1(-30,0) 2(30,0)
  silkscreen extent -100,-32 62,32, body extent -31,-16 32,16, height 18
SMD0805 [mil]
  rect 40x55 smd: 1(-40,0) 2(40,0)
  silkscreen extent -80,-50 80,50, body extent -39,-25 39,24, height 20
SMD1206 [mil]
  rect 65x70 smd: 1(-60,0) 2(60,0)
  silkscreen extent -120,-60 120,60, body extent -61,-30 61,31, height 22
"SMD1206 Polarized" [mil]
  rect 65x70 smd: 1(-60,0) 2(60,0)
  silkscreen extent -160,-60 120,60, body extent -61,-30 61,31, height 22
SOIC-8 [mil]
  rect 26x80 smd mask+3: 1(-75,-121) 2(-25,-121) 3(25,-121) 4(75,-121) 5(75,121) 6(25,121) 7(-25,121) 8(-75,121)
  silkscreen extent -100,-77 100,77, body extent -103,-76 103,76, height 68
SOT23-6L [mm] "ESDA6V1BC6"
  rect 1.2x0.6 smd: 1(-1.15,0.95) 2(-1.15,0) 3(-1.15,-0.95) 4(1.15,0.95) 5(1.15,0) 6(1.15,-0.95)
  silkscreen extent -0.28,-1.43 0.28,1.43, body extent -0.87,-1.53 0.87,1.53, height 1.45
SOT-23-3 [mm] "ESDCAN24-2BLY"
  rect 0.48x0.95 smd mask+0.076: 1(-0.97,-0.97) 2(0.97,-0.97) 3(0,0.97)
  silkscreen extent -1.52,-0.89 1.52,0.89, body extent -1.52,-0.87 1.52,0.88, height 1.5
SOT-223 [mm]
  rect 0.95x2.15 smd mask+0.076: 1(-2.3,0) 2(0,0) 3(2.3,0)
  rect 3.25x2.15 smd mask+0.076: 2(0,5.8)
"Test Point" [mil]
  rect 150x80 smd: 1(0,0)
  body extent -75,-30 75,30, height 90
TSSOP-20 [mm] "Specifically: PW (R-PDSO-G20)"
  rect 1.55x0.25 smd: 1(-2.8,2.925) 2(-2.8,2.275) 3(-2.8,1.625) 4(-2.8,0.975) 5(-2.8,0.325) 6(-2.8,-0.325) 7(-2.8,-0.975) 8(-2.8,-1.625) 9(-2.8,-2.275) 10(-2.8,-2.925) 11(2.8,-2.925) 12(2.8,-2.275) 13(2.8,-1.625) 14(2.8,-0.975) 15(2.8,-0.325) 16(2.8,0.325) 17(2.8,0.975) 18(2.8,1.625) 19(2.8,2.275) 20(2.8,2.925)
  silkscreen extent -1.19,-3.25 1.19,3.25
TSSOP-28 [mm]
  rect 1.78x0.356 smd mask+0.051: 1(0,0) 2(0,-0.65) 3(0,-1.3) 4(0,-1.95) 5(0,-2.6) 6(0,-3.25) 7(0,-3.9) 8(0,-4.55) 9(0,-5.2) 10(0,-5.85) 11(0,-6.5) 12(0,-7.15) 13(0,-7.8) 14(0,-8.45) 15(5.94,-8.45) 16(5.94,-7.8) 17(5.94,-7.15) 18(5.94,-6.5) 19(5.94,-5.85) 20(5.94,-5.2) 21(5.94,-4.55) 22(5.94,-3.9) 23(5.94,-3.25) 24(5.94,-2.6) 25(5.94,-1.95) 26(5.94,-1.3) 27(5.94,-0.65) 28(5.94,0)
  silkscreen extent 1.7,-8.78 4.24,0.33
"VSSOP-8 (DGK)" [mm]
  rect 1.45x0.45 smd mask+0.025: 1(0,0) 2(0,-0.65) 3(0,-1.3) 4(0,-1.95) 5(4.4,-1.95) 6(4.4,-1.3) 7(4.4,-0.65) 8(4.4,0)
  silkscreen extent 0.89,-2.28 3.48,0.33
"VSSOP-10 (DGS)" [mm]
  rect 0.25x1.45 smd mask+0.05: 1(-1,-2.2) 2(-0.5,-2.2) 3(0,-2.2) 4(0.5,-2.2) 5(1,-2.2) 6(1,2.2) 7(0.5,2.2) 8(0,2.2) 9(-0.5,2.2) 10(-1,2.2)
  silkscreen extent -1.25,-1.18 1.25,1.23

## Part data
C200 C201 C202 C313 C314 C317 C403 C906: library part "Capacitor Polarized", "Polarized Capacitor (Surface Mount)"
C203 C300 C301 C302 C303 C304 C305 C306 C307 C308 C309 C310 C311 C312 C319 C320 C321 C408 C409 C410 C411 C500 C900 C901 C902 C903 C907 C908 C909 C910 C911 C912 C913 C914 C915 C916 C917 C918 C919 C920 C921 C922 C923: library part "Capacitor Ceramic", "Ceramic Chip Capacitor"
C204 C205 C315 C316 C318 C401 C402 C404 C405 C406 C407 C412 C413: "Ceramic Chip Capacitor"
CON400: "RJ45 Ethernet Connector with built in magnetics"
CON600 CON601: library part AMP_26Pin, "AMP SuperSeal 1.0 26 Pin"
CON900: library part JTAG/SWO-20PIN
IC200: "3A DC/DC Converter (SM)"
IC201: "5V Precision Reference Voltage"
IC202: "3.3V 1A LDO"
IC300 IC301 IC302 IC303 IC304 IC306 IC307 IC308: "Rail to rail opamp"
IC305: "16:1 Mux"
IC309: "TI ADC; 250ksps"
IC400: "Ethernet PHY IC; compatitble with DP83848C"
IC401 IC402: library part SN65HVD1050
IC403 IC404: library part ESDCAN24-2BLY
IC500: "8 bit 5V to 3.3V level shifter"
IC600 IC601 IC602 IC603 IC604 IC605: "4 channel bi directional ESD protection"
L900: library part "Chip Ferrite Bead", "Ferrite Bead"
OSC400: library part SM7745HEV, "50Mhz Oscillator"
OSC900: library part ABMM2-8.000MHZ-E2-T
OSC901: library part "MC-306 32.768K-E3", "32.7680kHz Oscillator"
P800 P801 P803: library part "Header 3x1", "Header, 2-Pin"
P802 P804 P805: library part "Header 2x1", "Header, 2-Pin"
R200 R201 R300 R301 R302 R303 R304 R305 R306 R307 R308 R309 R310 R311 R312 R313 R314 R315 R316 R317 R318 R400 R401 R402 R403 R404 R405 R406 R407 R408 R409 R410 R411 R412 R413 R414 R415 R416 R500 R700 R701 R702 R703 R704 R705 R800 R801 R802 R900 R901 R902 R903 R904: library part Resistor, "Resistor"
SD700: "SD Card Connector (Amphenol)"

## Via types
v1: diameter 22, hole 12, Component Side to Solder Side, 196 vias
v2: diameter 25, hole 12, Component Side to Solder Side, 50 vias
v3: diameter 30, hole 15, Component Side to Solder Side, 9 vias
v4: diameter 160, hole 134, Component Side to Solder Side, 4 vias
v5: diameter 40, hole 20, Component Side to Solder Side, 4 vias
v6: diameter 250, hole 145, Component Side to Solder Side, 3 vias
v7: diameter 68.9, hole 59.06, Component Side to Solder Side, 2 vias
v8: diameter 25, hole 15, Component Side to Solder Side, 1 vias
v9: diameter 50, hole 30, Component Side to Solder Side, 1 vias

## Nets (pads, with @x,y where several pads share a name; then routed paths per layer and width w, separated by ;. In a path a pad name is that pad's centre, name@x,y a point inside that pad or via, vN(x,y) a via of type N, cw(c..) or ccw(c..) an arc to the next point about the centre after c; other vN are vias at no path point)
3V3: C202.1 C317.1 C318.2 C404.2 C405.2 C406.2 C407.2 C408.2 C409.1 C410.2 C411.2 C908.1 C909.2 C910.2 C911.2 C912.2 C913.2 C914.2 C915.2 C916.2 C917.2 C918.2 C919.2 C920.2 C921.1 CON400.1 CON400.6 CON400.8 CON400.10 CON900.1 CON900.2 IC202.3 IC305.1 IC309.9 IC400.22 IC400.32 IC400.48 IC500.2 L900.1 OSC400.1 OSC400.4 P801.1 R400.2 R402.2 R403.2 R404.1 R405.1 R407.1 R408.1 R409.2 R410.2 R700.1 R701.1 R702.1 R703.2 R704.2 R705.2 SD700.4 U900.6 U900.17 U900.30 U900.39 U900.52 U900.62 U900.72 U900.84 U900.95 U900.108 U900.121 U900.131 U900.143 U900.144 | length 6758.8
  Component Side w10: v1(2055,3790) 2070.43,3805.43 IC500.2@2070.43,3854.76 ; R403.2@3330,1740 3395,1740 v1(3415,1720) ; v2(3655,1670) C909.2@3715,1670 3760,1670 3777.36,1687.36 U900.62@3851.69,1687.36 ; v2(3655,1865) C910.2@3715,1865 3761.57,1865 3780.79,1884.21 U900.52@3851.69,1884.21 ; v2(3655,2135) C911.2@3715,2135 3775,2135 3780.12,2140.12 U900.39@3851.69,2140.12 ; v1(3700,1445) C908.1@3755,1445 3800.51,1490.51 U900.72@3851.69,1490.51 ; C912.2@3870,2375 3920,2375 ; v1(3920,2405) 3920,2375 ; U900.30@4043.62,2253.31 4043.62,2301.38 3970,2375 3920,2375 ; U900.84@4142.05,1416.69 4142.05,1357.95 4165,1335 C920.2@4165,1280 v2(4165,1220) ; U900.17@4299.53,2253.31 C913.2@4299.53,2394.53 ; C913.2@4300,2395 v2(4300,2455) ; v2(4325,3215) 4370,3215 ; U900.95@4358.58,1416.69 4358.58,1361.42 4380,1340 C919.2@4380,1280 v2(4380,1220) ; R702.1@4370,3170 4370,3215 ; R703.2@4370,3260 4370,3215 ; v2(4370,3610) R700.1@4370,3660 R704.2@4370,3745 R705.2@4370,3835 R701.1@4370,3930 ; v2(4510,2455) C914.2@4510,2395 4516.06,2388.94 U900.6@4516.06,2253.31 ; U900.108@4614.49,1416.69 4614.49,1360.51 4650,1325 C918.2@4650,1280 v2(4650,1220) ; U900.121@4688.31,1726.73 4766.73,1726.73 4785,1745 C917.2@4825,1745 v2(4885,1745) ; U900.143@4688.31,2159.8 C915.2@4795,2159.8 ; U900.144@4688.31,2179.49 C915.2@4795,2179.49 ; U900.131@4689.72,1925 C916.2@4825,1925 v2(4885,1925)
  Component Side w11: v1(2740,2110) R404.1@2795,2110 R405.1@2875,2110 ; IC400.22@2809.65,1686.1 2868.9,1686.1 2880,1675 2910,1675 v1(2925,1690) ; v1(2955,1325) R400.2@2955,1380 ; v1(3000,1220) OSC400.4@3066.5,1220 OSC400.1@3213.5,1220 ; IC400.32@3004.53,1589.65 3004.53,1639.53 v1(3005,1640) ; v1(3080,2130) C407.2@3145,2130 3155,2120 C404.2@3155,1975 3140.35,1960.35 IC400.48@3140.35,1863.27 ; v1(3385,1530) R402.2@3385,1585 ; v1(3400,4755) IC305.1@3435,4755 ; IC309.9@4236.61,4874.69 4364.69,4874.69 C318.2@4365,4875 4445,4875 C317.1@4475,4845 v1(4565,4845)
  Component Side w12: CON400.1@1884.76,1590 1900.12,1605.35 CON400.8@1982.01,1605.35 C409.1@2109.65,1605.35 ; CON400.6@1884.76,1989.61 1896.97,1989.61 CON400.10@1982.01,2074.65 1996.65,2060 C408.2@2115,2060 ; C410.2@2455,1675 2545,1675 ; C411.2@2455,1975 2545,1975 ; R407.1@2545,1635 2545,1675 ; R409.2@2545,1715 2545,1675 ; R408.1@2545,1935 2545,1975 ; R410.2@2545,2015 2545,1975 ; v1(2605,1675) 2545,1675 ; v1(2605,1975) 2545,1975 ; v1(4425,3540) 4427.09,3537.91 SD700.4@4585,3537.91 ; C914.2@4510,2395 C921.1@4665,2395
  Component Side w15: L900.1@3660,2630 v3(3735,2630) ; C915.2@4795,2170 4795,2179.49 4795,2195 v3(4880,2280)
  Component Side w20: IC202.3@3475.55,3400 3475.55,3304.45 C202.1@3515,3265
  Component Side w30: C202.1@3515,3265 v9(3810,3265)
  Solder Side w11: v1(2925,1690) 2925,1715 C406.2@2960,1750 ; v1(3005,1640) C405.2@3070,1640
5V: C200.1 C203.2 C314.1 C316.2 C412.1 C413.1 IC200.2 IC202.1 IC300.8 IC301.8 IC302.8 IC303.8 IC304.8 IC306.8 IC307.8 IC308.8 IC309.10 IC401.3 IC402.3 P801.2 R200.1 R500.2 | length 2411.8
  Component Side w10: v1(1985,4105) R500.2@1985,4165 ; v1(2410,4725) 2411,4726 IC303.8@2460,4726 ; v1(2415,5805) 2416,5806 IC302.8@2460,5806 ; v1(2430,4315) 2460,4285 IC300.8@2460,4186 ; v1(2445,5345) 2460,5330 IC307.8@2460,5266 ; C412.1@2785,2575 C412.1@2790,2580 ; C413.1@2795,3595 C413.1@2800,3600 ; v1(2930,5265) 2931,5266 IC308.8@2990,5266 ; v1(2935,4185) 2936,4186 IC301.8@2990,4186 ; v1(2940,4725) 2941,4726 IC304.8@2990,4726 ; v1(2945,5805) 2946,5806 IC306.8@2990,5806 ; IC309.10@4236.61,4894.37 4236.61,4968.39 C316.2@4235,4970 4235,5060 C314.1@4260,5085 v1(4260,5175)
  Component Side w12: IC401.3@2671,2575 C412.1@2785,2575 ; IC402.3@2671,3595 C413.1@2795,3595 ; C412.1@2790,2580 v1(2850,2580) ; C413.1@2800,3600 v1(2860,3600)
  Component Side w20: v3(2050,3060) C200.1@2145,3060 R200.1@2260,3060 IC200.2@2410,3060 ; C203.2@3260,3295 3294.45,3329.45 3292.32,3399.94 v3(3289.45,3495)
  Solder Side w20: v3(3355,2915) 3750,2915 3785,2950 P801.2@3785,3085
5V_THERMAL: IC200.5
  other v5: 2705,2965 2840,2965 2705,3175 2840,3175
5VADC: C205.2 C313.1 C315.2 IC201.6 IC309.1 | length 964
  Component Side w10: IC309.1@4063.39,4894.37 4063.39,4968.39 C315.2@4065,4970 4065,5055 C313.1@4035,5085 4035,5220 4320,5505 C205.2@4430,5505 4431.18,5506.18 IC201.6@4541.77,5506.18
12V: C201.1 C204.2 CON601.8 CON601.13 IC200.3 IC201.2 P802.1 | length 4479.2
  Component Side w10: IC201.2@4715,5480.59 4799.41,5480.59 C204.2@4800,5480
  Component Side w12: C204.2@4800,5480 4800,4865 v1(4870,4795)
  Component Side w20: CON601.8@1573.43,3099.06 1897.48,2775 2260,2775 2285,2800 ; IC200.3@2410,2960 2335,2885 C201.1@2285,2885 2285,2800 ; v3(3460,2800) 2285,2800
  Solder Side w10: CON601.8@1573.43,3099.06 1635,3160.63 1635,3628.03 CON601.13@1573.43,3689.61
  Solder Side w20: CON601.8@1573.43,3099.06 1675,2997.48 P802.1@1675,2375
A0: C305.2 IC305.9 R305.1 | length 1584.6
  Component Side w10: R305.1@2570,4280 C305.2@2675,4280 ; C305.2@2680,4275 2765,4275 2965,4075 3225,4075 3355,4205 3355,4385 3639.72,4669.72 IC305.9@3639.72,4755
A1: C306.2 IC305.8 R306.1 | length 752.4
  Component Side w10: R306.1@3100,4280 C306.2@3205,4280 ; C306.2@3210,4275 3614.13,4679.13 IC305.8@3614.13,4755
A2: C301.1 IC305.11 R301.2 | length 1225.9
  Component Side w10: R301.2@3100,3850 3105,3855 C301.1@3210,3855 3235,3855 3280,3900 3280,4060 3405,4185 3405,4365 3690.91,4650.91 IC305.11@3690.91,4755
A3: C300.1 IC305.10 R300.2 | length 1631.1
  Component Side w10: R300.2@2570,3850 2575,3855 C300.1@2680,3855 2770,3855 2965,4050 3235,4050 3380,4195 3380,4375 3665.32,4660.32 IC305.10@3665.32,4755
A4: C307.2 IC305.20 R307.1 | length 1597.8
  Component Side w10: R307.1@2570,5900 C307.2@2670,5900 ; C307.2@2680,5890 2775,5890 2965,5700 3210,5700 3335,5575 3335,5400 3639.72,5095.28 IC305.20@3639.72,4988.86
A5: C319.2 IC305.19 R313.1 | length 1243.7
  Component Side w10: R313.1@3100,5900 C319.2@3205,5900 ; C319.2@3210,5895 3285,5895 3365,5815 3365,5405 3665.32,5104.68 IC305.19@3665.32,4988.86
A6: C310.1 IC305.22 R310.2 | length 755
  Component Side w10: R310.2@3100,5470 3105,5475 C310.1@3210,5475 3280,5405 3280,5385 3588.54,5076.46 IC305.22@3588.54,4988.86
A7: C308.2 IC305.5 R308.1 | length 1131.1
  Component Side w10: R308.1@2570,4820 C308.2@2675,4820 ; C308.2@2680,4815 2765,4815 2965,4615 3445,4615 3537.36,4707.36 IC305.5@3537.36,4755
A8: C309.2 IC305.4 R309.1 | length 510.8
  Component Side w10: R309.1@3100,4820 C309.2@3205,4820 ; C309.2@3210,4815 3335,4690 3490,4690 3511.77,4711.77 IC305.4@3511.77,4755
A9: C303.1 IC305.6 R303.2 | length 1177.6
  Component Side w10: R303.2@2570,4390 2575,4395 C303.1@2680,4395 2770,4395 2965,4590 3455,4590 3562.95,4697.95 IC305.6@3562.95,4755
A10: C304.1 IC305.7 R304.2 | length 678.7
  Component Side w10: R304.2@3100,4390 3105,4395 C304.1@3210,4395 3295,4395 3588.54,4688.54 IC305.7@3588.54,4755
A11: C320.2 IC305.24 R314.1 | length 1154.3
  Component Side w10: R314.1@2570,5360 C320.2@2675,5360 ; C320.2@2680,5355 2725,5355 2920,5160 3435,5160 3537.36,5057.64 IC305.24@3537.36,4988.86
A12: C302.1 IC305.21 R302.2 | length 1555.5
  Component Side w10: R302.2@2570,5470 C302.1@2675,5470 ; C302.1@2680,5475 2770,5475 2965,5670 3195,5670 3310,5555 3310,5390 3614.13,5085.87 IC305.21@3614.13,4988.86
A13: C311.1 IC305.25 R311.2 | length 1122
  Component Side w10: R311.2@2570,4930 2575,4935 C311.1@2680,4935 2720,4935 2920,5135 3425,5135 3511.77,5048.23 IC305.25@3511.77,4988.86
A14: C312.1 IC305.26 R312.2 | length 502.9
  Component Side w10: R312.2@3100,4930 3105,4935 C312.1@3210,4935 3265,4935 3395,5065 3460,5065 3486.18,5038.82 IC305.26@3486.18,4988.86
A15: C321.2 IC305.23 R315.1 | length 655.4
  Component Side w10: R315.1@3100,5360 C321.2@3205,5360 ; C321.2@3210,5355 3275,5355 3562.95,5067.05 IC305.23@3562.95,4988.86
ADC_CS: R316.2 TP806.1 U900.3 | length 2754
  Component Side w10: TP806.1@4090,4290 v2(4090,4465) 4090,4540 R316.2@4140,4590 ; U900.3@4575.12,2253.31 4575.12,2295.12 v1(4600,2320)
  Solder Side w10: v2(4090,4465) 4200,4355 4200,3071.72 4580,2691.72 4580,2385 4600,2365 v1(4600,2320)
ADC_DOUT: R317.2 TP807.1 U900.4 | length 2943
  Component Side w10: TP807.1@4220,4290 v2(4220,4465) R317.2@4220,4590 ; v1(4555,2320) 4555.43,2319.57 U900.4@4555.43,2253.31
  Solder Side w10: v2(4220,4465) 4180,4505 4065,4505 4045,4485 4045,4450 4180,4315 4180,3063.43 4555,2688.43 v1(4555,2320)
ADC_IN: IC305.28 IC309.2 | length 727.7
  Component Side w10: IC305.28@3435,4988.86 3435,4900 3460,4875 4063.07,4875 IC309.2@4063.39,4874.69
ADC_SCLK: R318.2 TP808.1 U900.1 | length 2783
  Component Side w10: R318.2@4300,4590 4350,4540 v1(4350,4465) TP808.1@4350,4290 ; U900.1@4614.49,2253.31 4628.31,2253.31 4645,2270 v1(4645,2320)
  Solder Side w10: v1(4350,4465) 4220,4335 4220,3080 4600,2700 4600,2400 4645,2355 v1(4645,2320)
AIN0: CON600.1 IC300.5 IC600.6 | length 1539.6
  Component Side w10: CON600.1@1475,4805 1705,4575 v1(2100,4575) 2102.4,4572.6 IC600.6@2102.4,4535.28 ; v8(2610,4110) IC300.5@2610,4186
  Solder Side w10: v1(2100,4575) 2565,4110 v8(2610,4110)
AIN1: CON600.2 IC301.5 IC600.4 | length 2300.1
  Component Side w10: CON600.2@1475,4923.11 1425,4873.11 1425,4775 1664.72,4535.28 v1(1994.72,4535.28) IC600.4@2027.6,4535.28 ; v1(3140,4105) IC301.5@3140,4186
  Solder Side w10: v1(1994.72,4535.28) 2084.72,4535.28 2545,4075 3110,4075 v1(3140,4105)
AIN2: CON600.3 IC301.3 IC600.1 | length 2410.6
  Component Side w10: CON600.3@1475,5041.22 1405,4971.22 1405,4760 1720.28,4444.72 v1(1994.72,4444.72) IC600.1@2027.6,4444.72 ; IC301.3@3090,3944 v1(3090,4020)
  Solder Side w10: v1(1994.72,4444.72) 2100.28,4444.72 2495,4050 3060,4050 v1(3090,4020)
AIN3: CON600.4 IC300.3 IC600.3 | length 2045.7
  Component Side w10: CON600.4@1475,5159.33 1385,5069.33 1385,4745 1730,4400 v1(2100,4400) 2102.4,4402.4 IC600.3@2102.4,4444.72 ; IC300.3@2560,3944 v1(2560,4015)
  Solder Side w10: v1(2100,4400) 2485,4015 v1(2560,4015)
AIN4: CON600.5 IC302.5 IC605.6 | length 1824
  Component Side w10: CON600.5@1475,5277.44 1405,5347.44 1405,5550 1755,5900 v1(2100,5900) 2102.4,5897.6 IC605.6@2102.4,5850.28 2149.72,5850.28 2275,5725 2595,5725 2610,5740 IC302.5@2610,5806
AIN5: CON600.6 IC306.5 IC605.4 | length 2193.6
  Component Side w10: CON600.6@1475,5395.55 1425,5445.55 1425,5540 1735,5850 v1(1985,5850) 1985.28,5850.28 IC605.4@2027.6,5850.28 ; v1(3140,5730) IC306.5@3140,5806
  Solder Side w10: v1(1985,5850) 2115,5850 2255,5710 3120,5710 v1(3140,5730)
AIN6: CON600.7 IC306.3 IC605.1 | length 1885.1
  Component Side w10: CON600.7@1475,5513.66 1721.34,5760 v1(1985,5760) IC605.1@2027.32,5760 ; IC306.3@3090,5564 v1(3090,5640)
  Solder Side w10: v1(1985,5760) 2155,5760 2255,5660 3070,5660 v1(3090,5640)
AIN7: CON600.8 IC303.5 IC601.6 | length 1333.6
  Component Side w10: CON600.8@1573.43,4864.06 1717.48,4720 1905,4720 1995,4810 v1(2100,4810) 2102.4,4807.6 IC601.6@2102.4,4760.28 ; v1(2610,4645) IC303.5@2610,4726
  Solder Side w10: v1(2100,4810) 2265,4645 v1(2610,4645)
AIN8: CON600.9 IC304.5 IC601.4 | length 2054.2
  Component Side w10: CON600.9@1573.43,4982.17 1525,4933.74 1525,4835 1660,4700 1930,4700 v1(1990,4760) 1990.28,4760.28 IC601.4@2027.6,4760.28 ; v1(3140,4645) IC304.5@3140,4726
  Solder Side w10: v1(1990,4760) 2070,4760 2215,4615 3110,4615 v1(3140,4645)
AIN9: CON600.10 IC303.3 IC601.3 | length 1564.3
  Component Side w10: v1(2100,4625) IC601.3@2100,4667.32 ; IC303.3@2560,4484 v1(2560,4560)
  Solder Side w10: CON600.10@1573.43,5100.28 1525,5051.85 1525,4815 1715,4625 v1(2100,4625) 2165,4560 v1(2560,4560)
AIN10: CON600.11 IC304.3 IC601.1 | length 2120.4
  Component Side w10: v1(1990,4670) IC601.1@2027.32,4670 ; IC304.3@3090,4484 v1(3090,4565)
  Solder Side w10: CON600.11@1573.43,5218.39 1630,5161.81 1630,4795 1755,4670 v1(1990,4670) 2105,4670 2185,4590 3065,4590 v1(3090,4565)
AIN11: CON600.12 IC307.5 IC604.6 | length 1636.5
  Component Side w10: CON600.12@1573.43,5336.5 1635,5398.07 1635,5475 1840,5680 v1(2100,5680) 2102.4,5677.6 IC604.6@2102.4,5635.28 ; v1(2610,5190) IC307.5@2610,5266
  Solder Side w10: v1(2100,5680) 2405,5375 2405,5225 2440,5190 v1(2610,5190)
AIN12: CON600.13 IC302.3 IC605.3 | length 1254.6
  Component Side w10: CON600.13@1573.43,5454.61 1833.82,5715 v1(2100,5715) 2102.4,5717.4 IC605.3@2102.4,5759.72 2135.28,5759.72 2255,5640 2545,5640 2560,5625 IC302.3@2560,5564
AIN13: CON600.14 IC307.3 IC602.1 | length 1088.8
  Component Side w10: CON600.14@1691.54,4864.06 1969.06,4864.06 v1(1990,4885) 2022.87,4885 IC602.1@2027.6,4889.72 ; IC307.3@2560,5024 v1(2560,5105)
  Solder Side w10: v1(1990,4885) 2175,4885 2395,5105 v1(2560,5105)
AIN14: CON600.15 IC308.3 IC602.6 | length 1600.9
  Component Side w10: CON600.15@1691.54,4982.17 1947.17,4982.17 1990,5025 v1(2100,5025) 2102.4,5022.6 IC602.6@2102.4,4980.28 ; IC308.3@3090,5024 v1(3090,5105)
  Solder Side w10: v1(2100,5025) 2265,5025 2375,5135 3060,5135 v1(3090,5105)
AIN15: CON600.16 IC308.5 IC603.1 | length 1599
  Component Side w10: CON600.16@1691.54,5100.28 1950,5100.28 1959.72,5110 v1(1990,5110) IC603.1@2027.32,5110 ; v1(3140,5190) IC308.5@3140,5266
  Solder Side w10: v1(1990,5110) 2310,5110 2360,5160 3110,5160 v1(3140,5190)
BOOT0: R904.2 U900.138 | length 322.3
  Component Side w10: U900.138@4688.31,2061.38 5008.62,2061.38 R904.2@5010,2060
CAN0RX: R415.2 U900.139 | length 3585.8
  Component Side w10: R415.2@2820,2685 3045,2685 3110,2750 3760,2750 3940,2930 5095,2930 5155,2870 5155,2305 4931.06,2081.06 U900.139@4688.31,2081.06
CAN0TX: R411.2 U900.140 | length 3619.1
  Component Side w10: R411.2@2820,2420 3130,2730 3770,2730 3950,2910 5085,2910 5135,2860 5135,2315 4920.75,2100.75 U900.140@4688.31,2100.75
CAN1RX: R416.2 U900.135 | length 4228
  Component Side w10: R416.2@2820,3710 2855,3710 2915,3650 2915,3470 3405,2980 5115,2980 5205,2890 5205,2045 5140,1980 4945,1980 4922.68,2002.32 U900.135@4688.31,2002.32
CAN1TX: R412.2 U900.136 | length 3950.6
  Component Side w10: R412.2@2820,3440 2915,3440 3395,2960 5105,2960 5185,2880 5185,2055 5130,2000 4950,2000 4927.99,2022.01 U900.136@4688.31,2022.01
CANH0: CON601.2 IC401.7 IC403.2 R413.1 TP812.1 | length 1528.6
  Component Side w12: CON601.2@1475,3158.11 1400,3083.11 1400,2980 1868.19,2511.81 IC403.2@2021.81,2511.81 ; TP812.1@2025,2420 2025,2508.62 IC403.2@2021.81,2511.81 ; R413.1@2301.81,2511.81 IC403.2@2021.81,2511.81 ; R413.1@2301.81,2516.81 R413.1@2305,2520 2310,2525 IC401.7@2429,2525